# Altium PCB FC_F7_PCB.PcbDoc (part 1 of 2)
Units mm, origin at the board's own origin, x right, y up, seen from the top; angles counter-clockwise.
Board outline 36 x 36 mm, 4 copper layers (Top Layer, Ground Plane, Power Plane, Bottom Layer), stack 1.586 mm thick; 88 components, 73 nets, 327 pads, 57 vias.
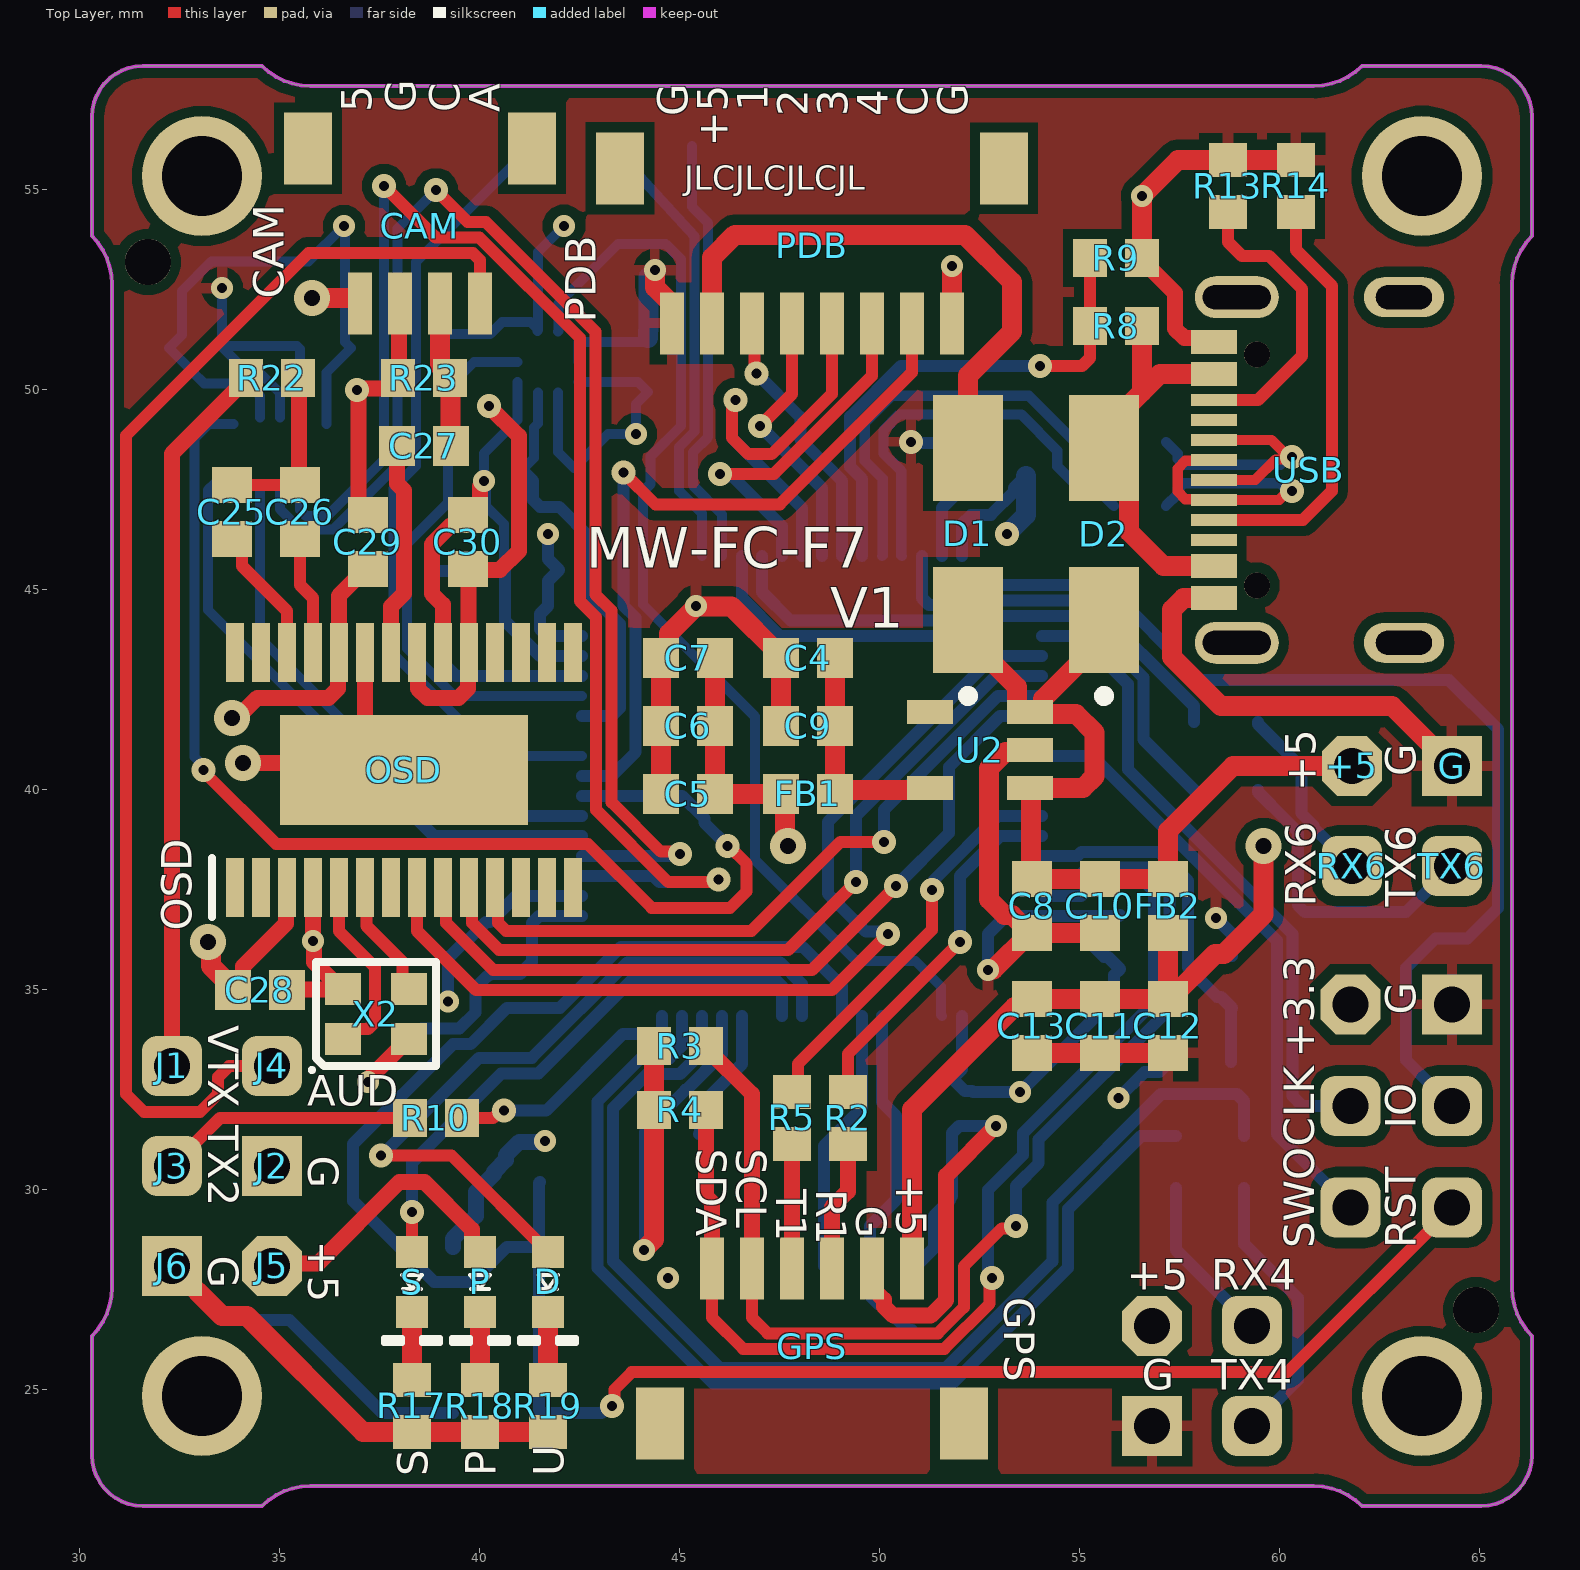
[diagram p0: Top Layer view]
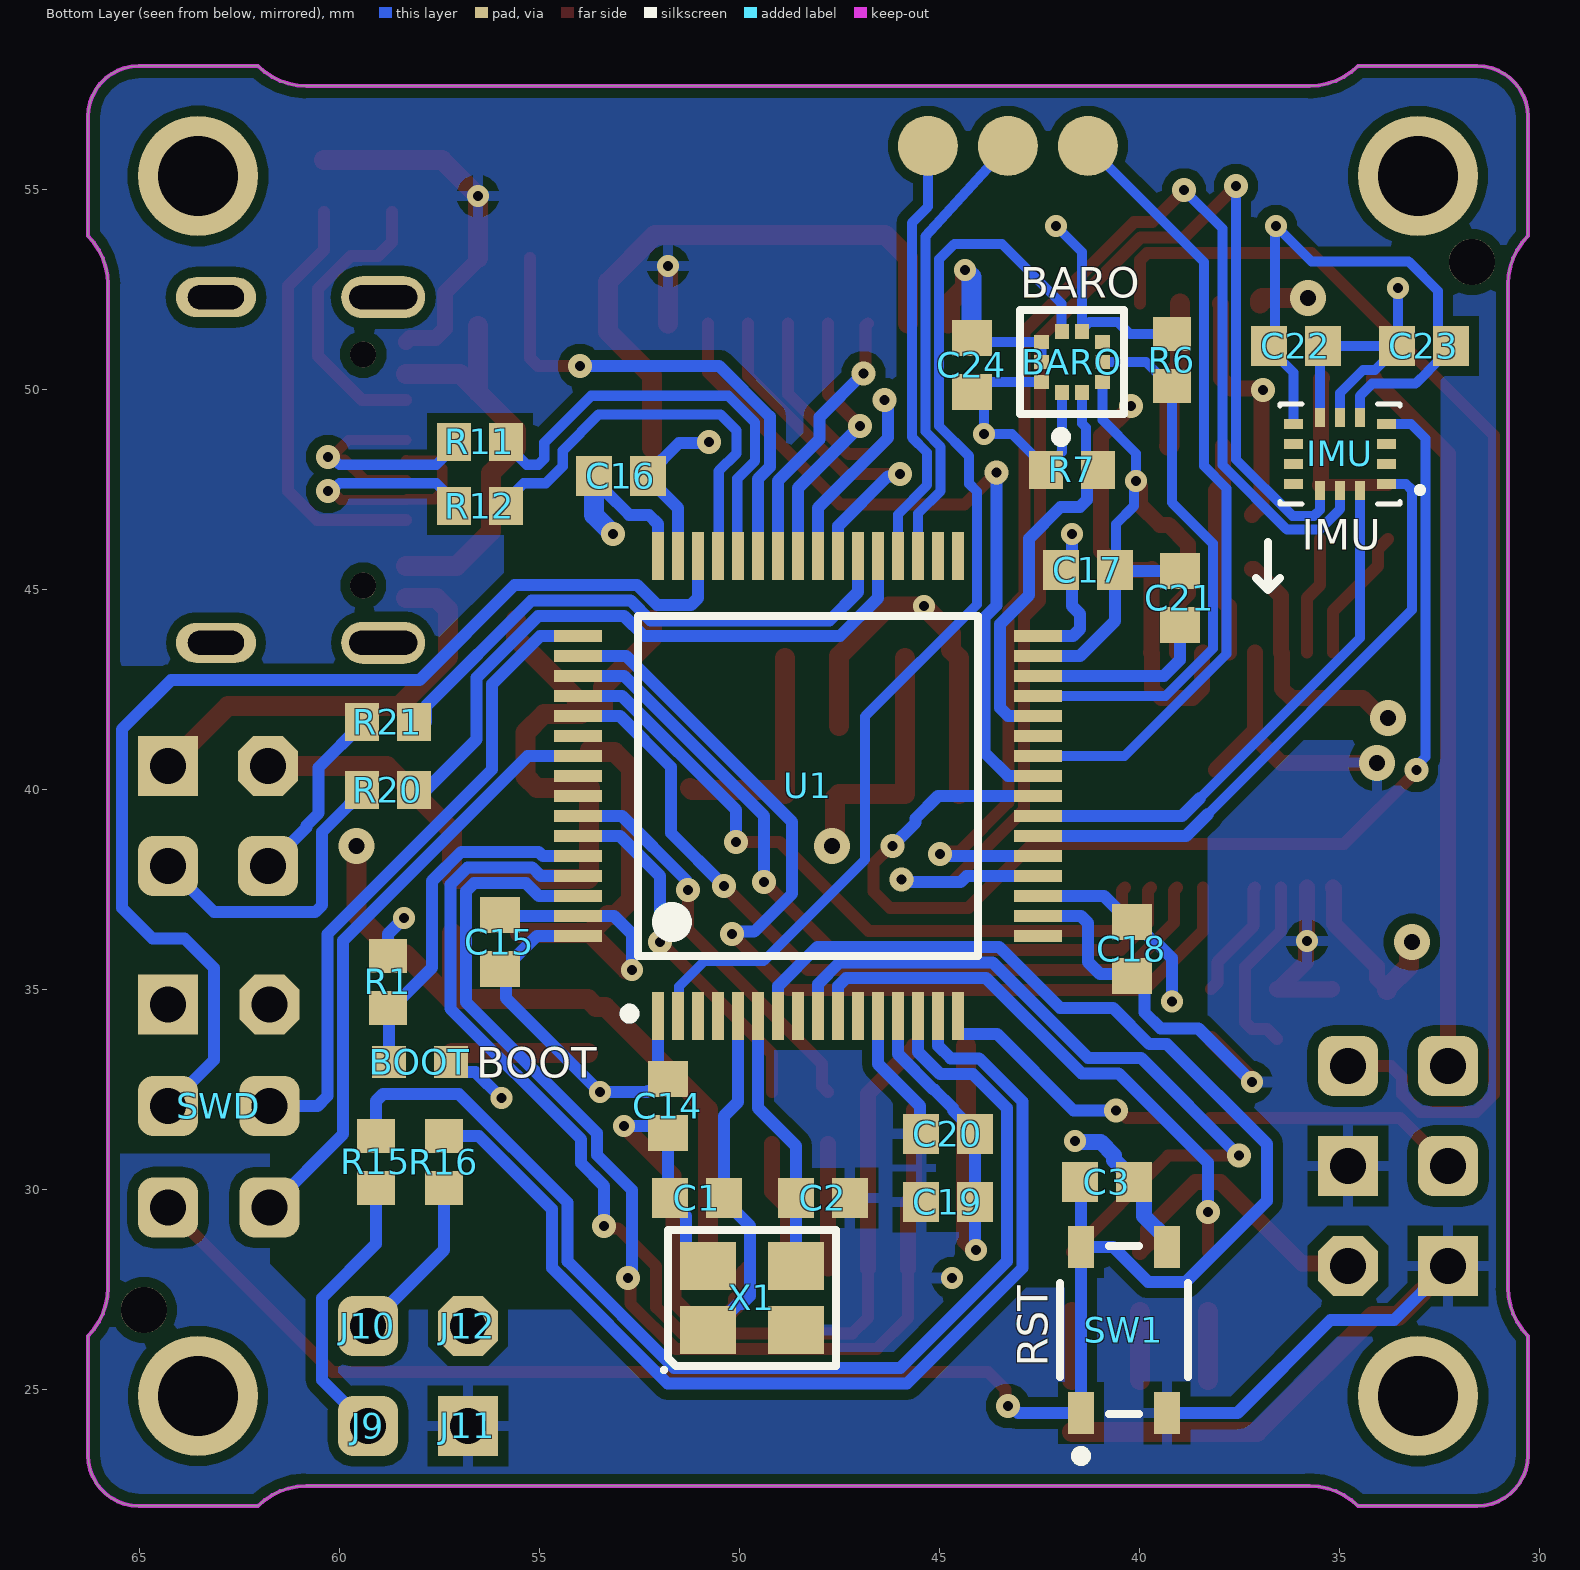
[diagram p1: Bottom Layer view, seen from below]
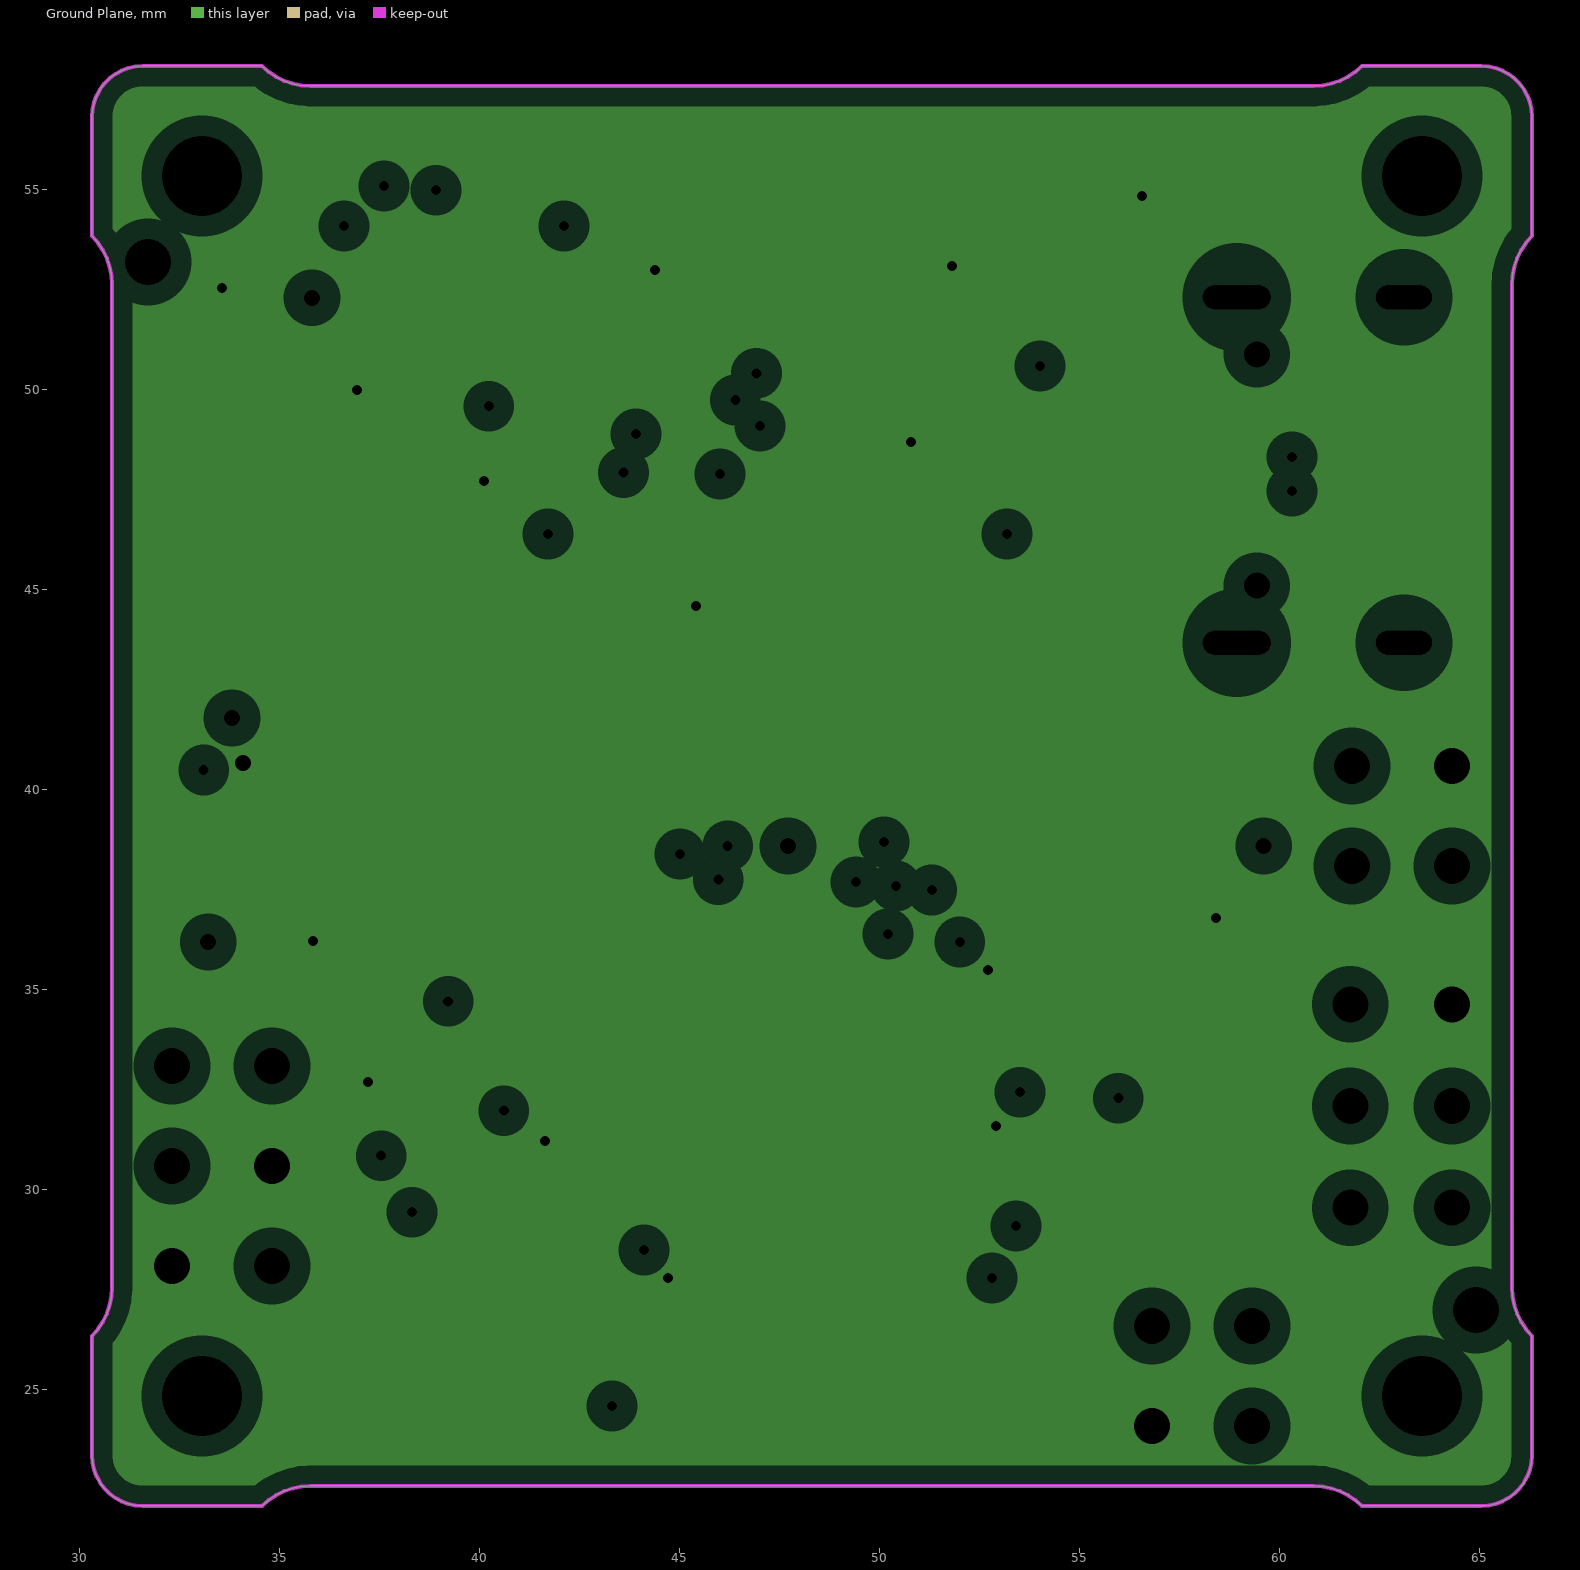
[diagram p2: Ground Plane, clearances drawn from the general rule]
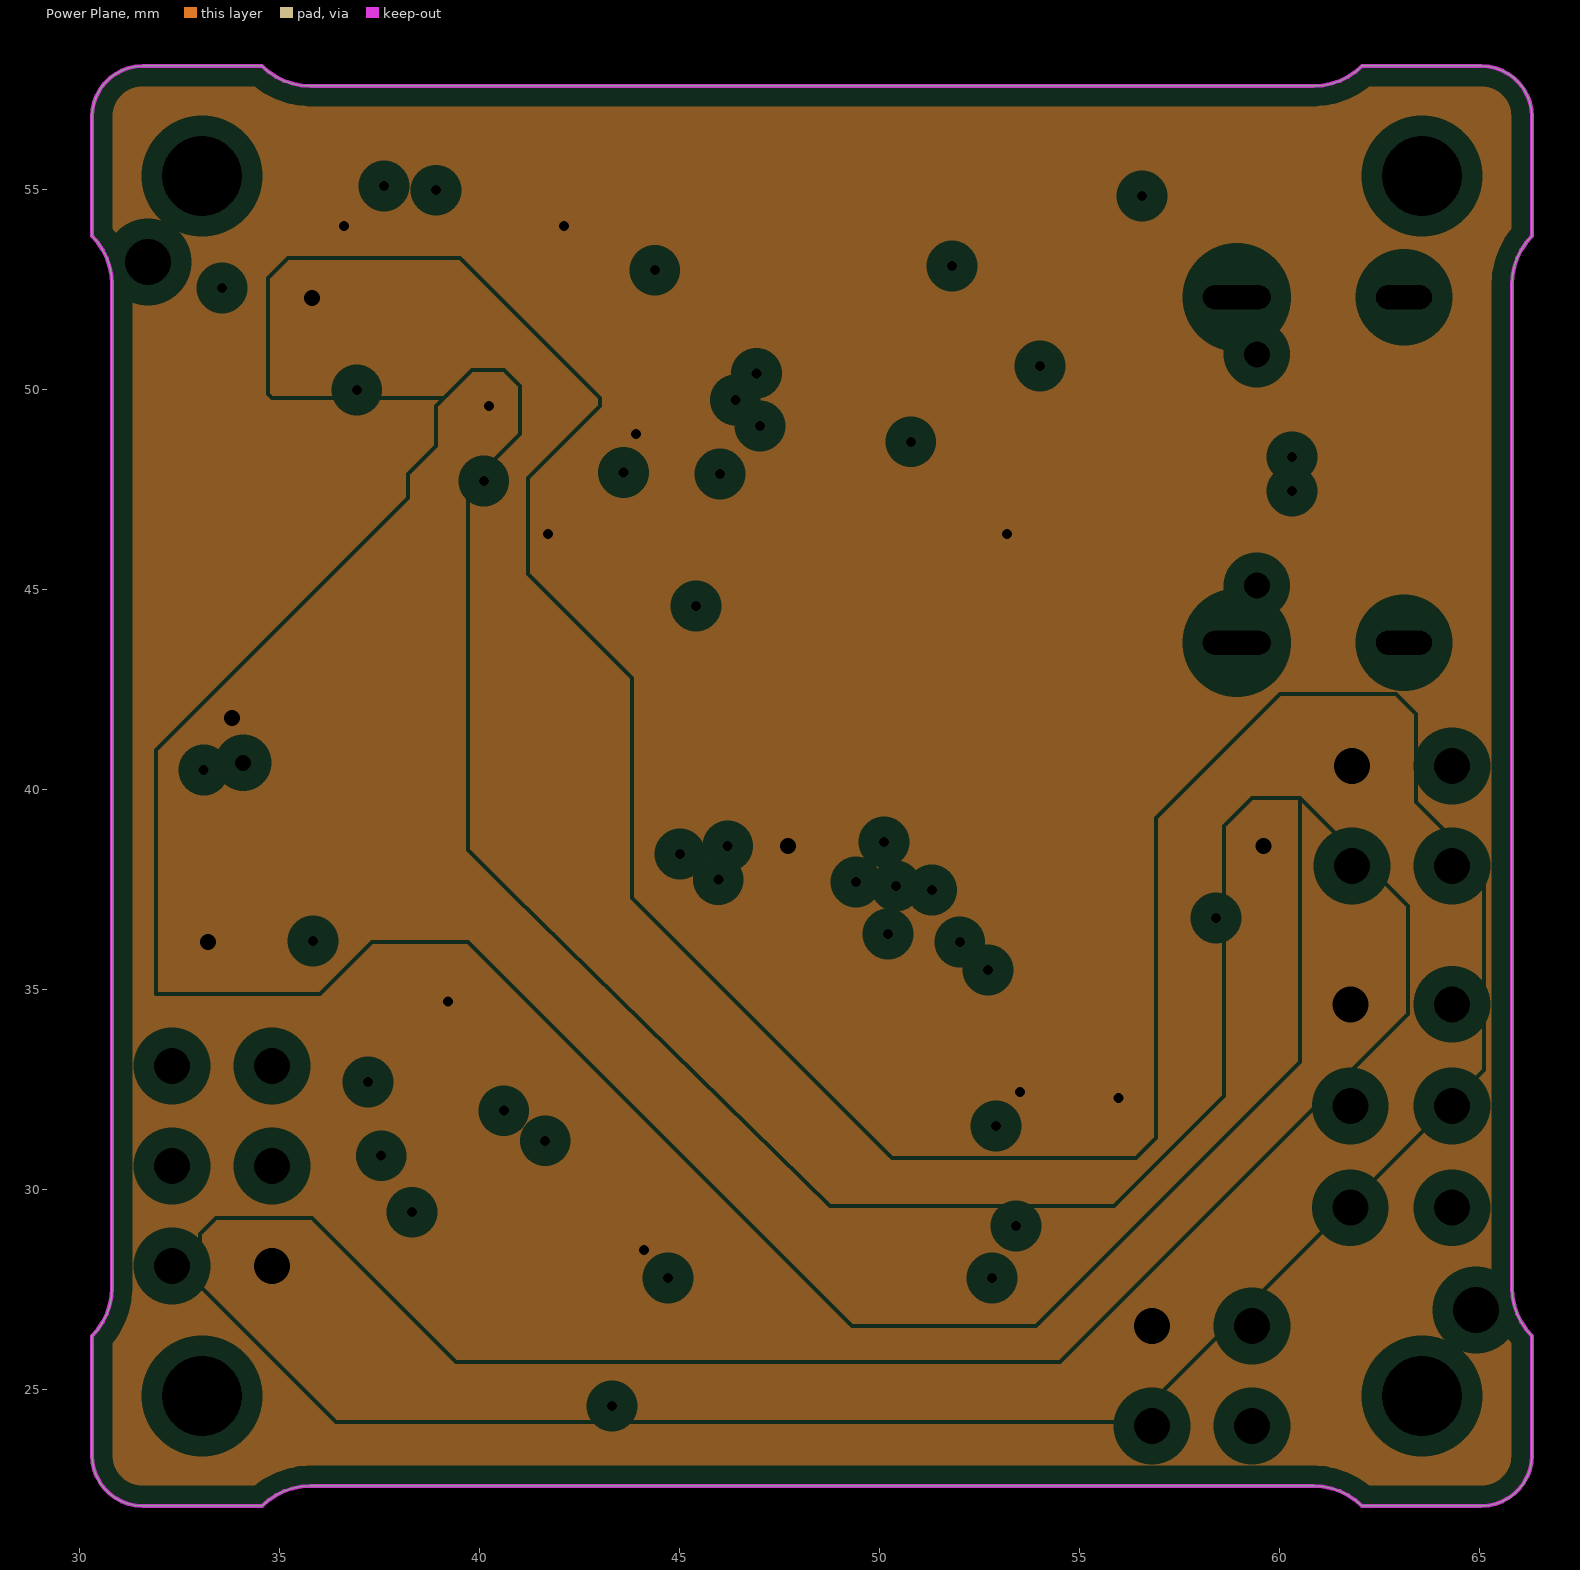
[diagram p3: Power Plane, clearances drawn from the general rule]
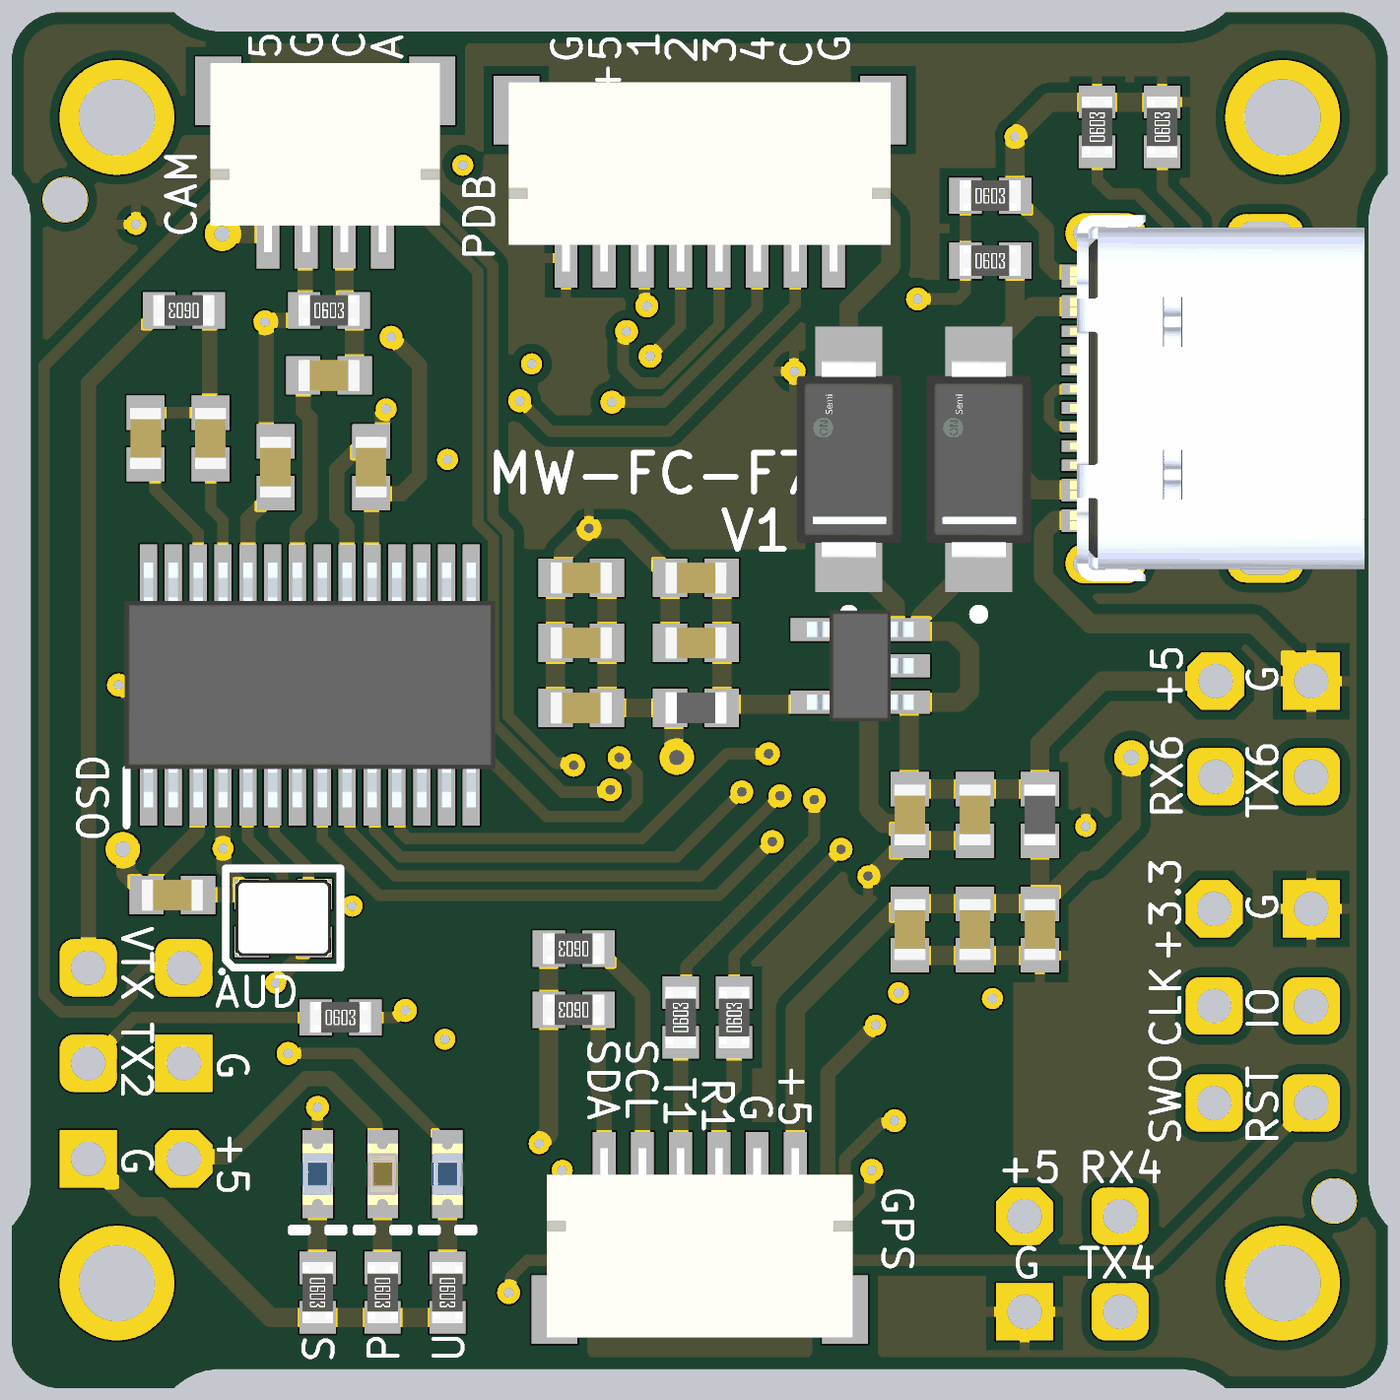
[diagram p5: 3D render of the assembled board from above, using the file's embedded part models]
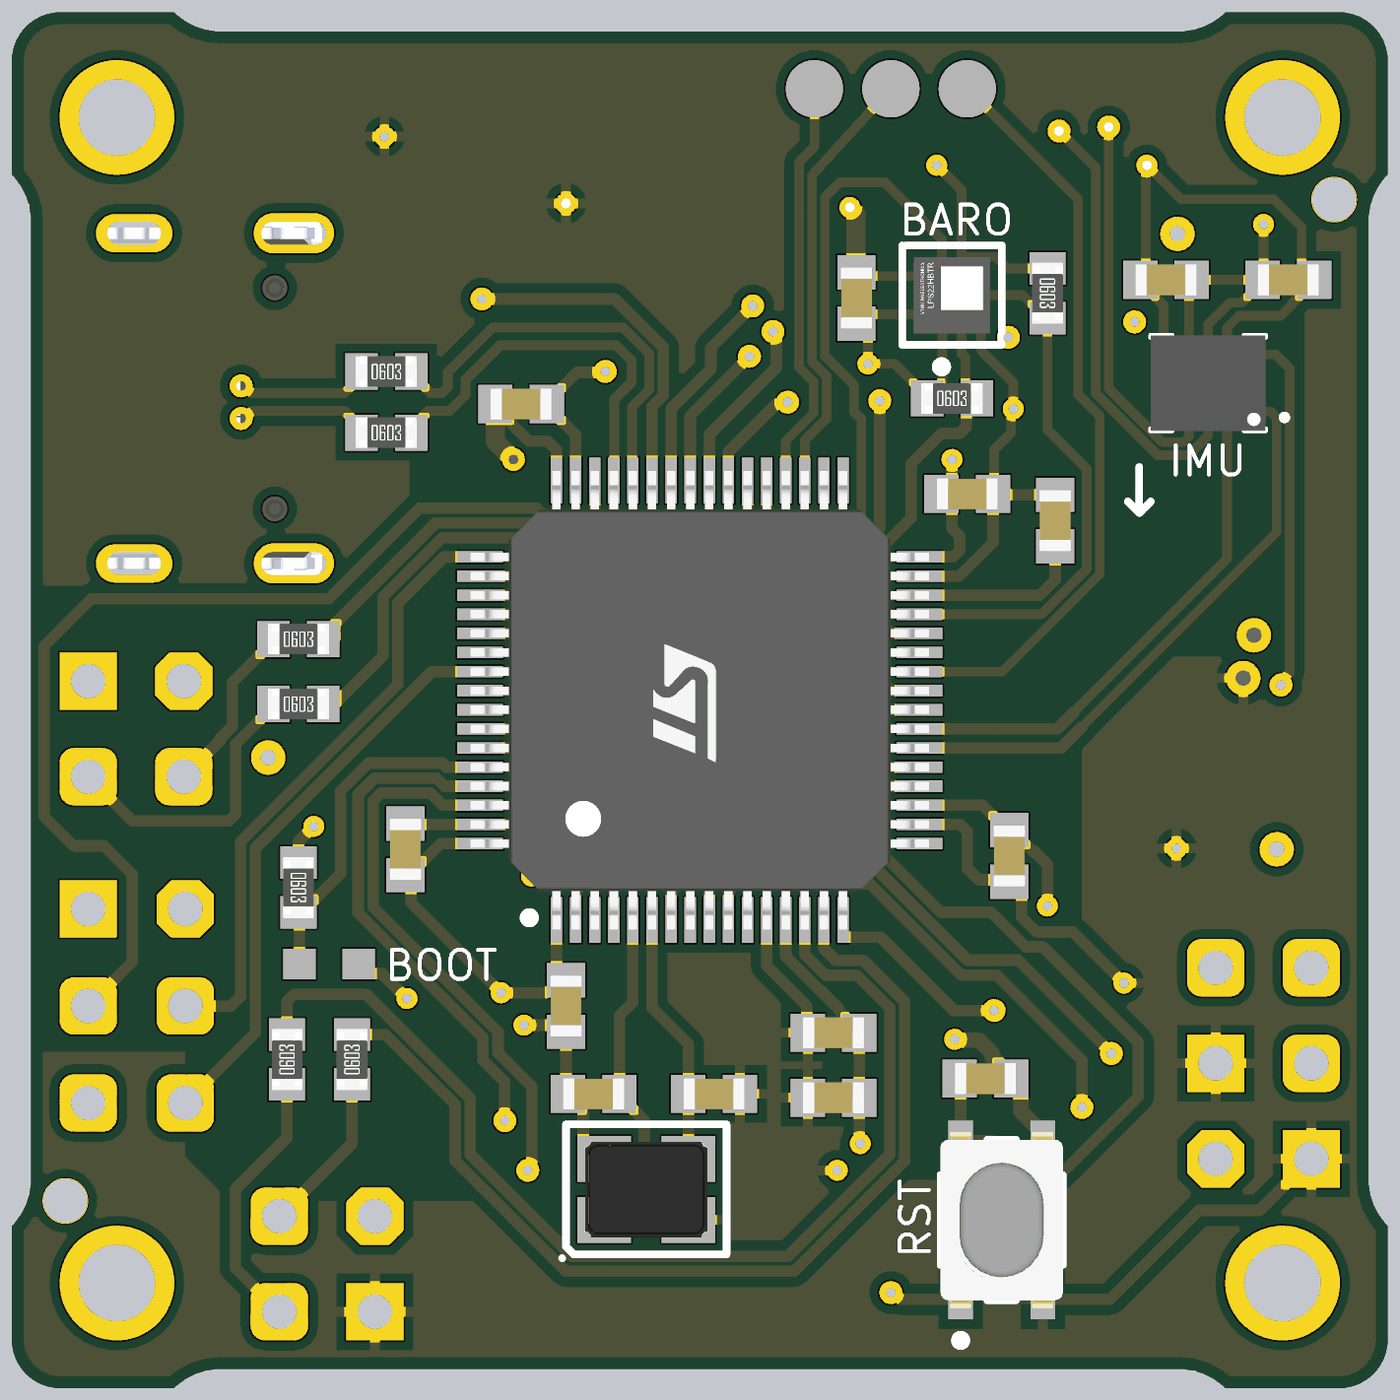
[diagram p6: 3D render of the assembled board from below, using the file's embedded part models]

## Layer stack, top to bottom
Top Solder: solder mask 0.0254, SM-001, Dk 4
Top Layer: signal copper 0.035
Dielectric 1: prepreg 0.2104, PP-017, Dk 4.6
Ground Plane: plane copper 0.0152, net GND
Dielectric 3: core 1.065, Core-039, Dk 4.6
Power Plane: plane copper 0.0152, net (Multiple Nets)
Dielectric 5: prepreg 0.2104, PP-017, Dk 4.6
Bottom Layer: signal copper 0.035
Bottom Solder: solder mask 0.0254, SM-001, Dk 4

## Board outline
30.3,23.37 30.3,26.35 ccw(c29.093,27.557) 30.8,27.557 30.8,52.643 ccw(c29.093,52.643) 30.3,53.85 30.3,56.83 cw(c31.57,56.83) 31.57,58.1 34.55,58.1 ccw(c35.757,59.307) 35.757,57.6 60.843,57.6 ccw(c60.843,59.307) 62.05,58.1 65.03,58.1 cw(c65.03,56.83) 66.3,56.83 66.3,53.85 ccw(c67.507,52.643) 65.8,52.643 65.8,27.557 ccw(c67.507,27.557) 66.3,26.35 66.3,23.37 cw(c65.03,23.37) 65.03,22.1 62.05,22.1 ccw(c60.843,20.893) 60.843,22.6 35.757,22.6 ccw(c35.757,20.893) 34.55,22.1 31.57,22.1 cw(c31.57,23.37)

## Design rules (kind name [scope] priority, off if disabled: settings)
Clearance [All] p1: gap=0.254 ignorepadtopadclearanceinfootprint=FALSE except(0: Arc-Hole Track-Hole SMDPad-Hole THPad-Hole Via-Hole Fill-Hole Poly-Hole Region-Hole Text-Hole; 0.09: Arc-Arc Arc-Track Track-Track; 0.127: SMDPad-SMDPad; 0.2: Arc-SMDPad Track-SMDPad; 0.5: SMDPad-THPad)
DiffPairsRouting [All] p1: maxlimit=0.203 minlimit=0.203 mostfreqgap=0.203 toplayer_minwidth=0.271 toplayer_maxwidth=0.271 toplayer_prefwidth=0.271 bottomlayer_minwidth=0.271 bottomlayer_maxwidth=0.271 bottomlayer_prefwidth=0.271 impedanceprofiledriven=TRUE impedanceprofileid={7BFADA2D-7B13-4B1E-B96C-2C4142A0F118} impedanceprofilevalue=90.000000 maxuncoupledlength=12.7
HoleSize [All] p1: absolutevalues=TRUE maxlimit=6.3 minlimit=0.2 maxpercent=80.000 minpercent=20.000
HoleToHoleClearance [All] p1: gap=0.5 allowstackedmicrovias=TRUE
MinimumAnnularRing [All] p1: minimumring=0.13
MinimumSolderMaskSliver [All] p1: minsoldermaskwidth=0.2
PlaneClearance [All] p1: clearance=0.508
PlaneConnect [All] p1: planeconnectstyle=Relief reliefexpansion=0.508 reliefentries=4 reliefconductorwidth=0.254 reliefairgap=0.254
PolygonConnect [All] p1: connectstyle=Relief reliefconductorwidth=0.254 reliefentries=4 polygonreliefangle="90 Angle" airgapwidth=0.254
RoutingVias [All] p1: holewidth=0.3 width=0.7 viastyle="Through Hole" minholewidth=0.25 minwidth=0.55 maxholewidth=0.4 maxwidth=0.9
SilkToSilkClearance [All] p1: silktosilkclearance=0.15
SilkToSolderMaskClearance [IsPad] p1: minsilkscreentomaskgap=0.15 clearancetoexposedcopper=FALSE
SolderMaskExpansion [All] p1: expansion=0.05 istentingtop=FALSE
UnRoutedNet [All] p1: checkbadconnections=TRUE
Width [All] p1: maxlimit=0.5 minlimit=0.2 preferedwidth=0.3
21 further rules are at their usual default settings.

## Classes and differential pairs
component class Sensors: BARO C22 C23 C24 GPS IMU R2 R3 R4 R5 R7 TX6
component class "Power Distribution": C4 C5 C6 C7 C8 C9 C10 C11 C12 C13 C14 C15 C16 C17 C18 C19 C20 C21 D1 D2 FB1 FB2 U2
component class Peripherials: +5 CAM D G J1 J2 J3 J4 J5 J6 J9 J10 J11 J12 P PDB R8 R9 R10 R11 R12 R13 R14 R15 R16 R17 R18 R19 R20 R21 RX6 S SWD TX6 USB
component class On-Screen-Display: C25 C26 C27 C28 C29 C30 OSD R22 R23 X2
component class MCU: BOOT BOOT1 C1 C2 C3 R1 SW1 U1 X1
differential pair USB_FS_D: +USB_FS_D_P -USB_FS_D_N
differential pair USB_D: +USB_D_P -USB_D_N

## Components (designator, comment, footprint, x,y, rotation, side; value= is the part's Value field where it differs from the comment)
+5 "Socket" PIN1#1 61.8,40.6 r0 top (schematic designator J8)
BARO "LPS22HBTR" FP-HLGA-10L-8479831-0 41.7,50.7 r90 bottom
BOOT "DNM" C0603_DNM 58,33.2 r0 bottom
C1 "8 pF" "CAP 0603_1608" 51.075,29.8 r0 bottom
C2 "8 pF" "CAP 0603_1608" 47.925,29.8 r0 bottom
C3 "0.1µF" "CAP 0603_1608" 40.825,30.2 r180 bottom
C4 "1 µF" "CAP 0603_1608" 48.2,43.3 r0 top
C5 "10nF" "CAP 0603_1608" 45.2,39.9 r0 top
C6 "100 pF" "CAP 0603_1608" 45.2,41.6 r0 top
C7 "47 µF" "CAP 0603_1608" 45.2,43.3 r0 top
C8 "1 µF" "CAP 0603_1608" 53.8,37.1 r90 top
C9 "1 µF" "CAP 0603_1608" 48.2,41.6 r0 top
C10 "1 µF" "CAP 0603_1608" 55.5,37.1 r90 top
C11 "10nF" "CAP 0603_1608" 55.5,34.1 r90 top
C12 "100 pF" "CAP 0603_1608" 57.2,34.1 r90 top
C13 "47 µF" "CAP 0603_1608" 53.8,34.1 r90 top
C14 "4.7 µF" "CAP 0603_1608" 51.8,32.1 r90 bottom
C15 "0.1µF" "CAP 0603_1608" 56,36.2 r270 bottom
C16 "0.1µF" "CAP 0603_1608" 52.975,47.85 r0 bottom
C17 "0.1µF" "CAP 0603_1608" 41.3,45.5 r0 bottom
C18 "0.1µF" "CAP 0603_1608" 40.2,36.025 r90 bottom
C19 "1 µF" "CAP 0603_1608" 44.8,29.7 r180 bottom
C20 "0.1µF" "CAP 0603_1608" 44.8,31.4 r180 bottom
C21 "4.7µF" "CAP 0603_1608" 39,44.8 r270 bottom
C22 "0.1µF" "CAP 0603_1608" 36.1,51.1 r180 bottom
C23 "0.1µF" "CAP 0603_1608" 32.9,51.1 r0 bottom
C24 "0.1µF" "CAP 0603_1608" 44.2,50.625 r90 bottom
C25 "47 µF" "CAP 0603_1608" 33.8,46.95 r90 top
C26 "22 µF" "CAP 0603_1608" 35.5,46.95 r90 top
C27 "0.1µF" "CAP 0603_1608" 38.6,48.6 r180 top
C28 "0.1µF" "CAP 0603_1608" 34.5,35 r180 top
C29 "0.1µF" "CAP 0603_1608" 37.2,46.2 r270 top
C30 "0.1µF" "CAP 0603_1608" 39.7,46.2 r270 top
CAM "SM04B-SRSS-TB(LF)(SN)" "JST SM04B-SRSS-TB" 38.5,54.2 r0 top
D "Blue" "LED 0603_1608 BLUE" 41.7,27.7 r270 top (schematic designator DATA)
D1 "SS14" FP-403AE-MFG 52.2,46.4 r270 top
D2 "SS14" FP-403AE-MFG 55.6,46.4 r270 top
FB1 "120RF" "FER 0603_1608" 48.2,39.9 r180 top value="120 Ohms @ 100 MHz"
FB2 "120RF" "FER 0603_1608" 57.2,37.1 r270 top value="120 Ohms @ 100 MHz"
G "Socket" PIN1#2 64.3,40.6 r180 top (schematic designator J7)
GPS "SM06B-SRSS-TB(LF)(SN)" "JST SM06B-SRSS-TB" 48.3,26 r180 top
IMU "BMI270" XDCR_BMI270 35,48.4 r0 bottom
J1 "Socket" PIN1#3 32.3,33.1 r0 top
J2 "Socket" PIN1#2 34.8,30.6 r0 top
J3 "Socket" PIN1#3 32.3,30.6 r0 top
J4 "Socket" PIN1#3 34.8,33.1 r0 top
J5 "Socket" PIN1#1 34.8,28.1 r0 top
J6 "Socket" PIN1#2 32.3,28.1 r0 top
J9 "Socket" PIN1#3 59.3,24.1 r180 bottom
J10 "Socket" PIN1#3 59.3,26.6 r180 bottom
J11 "Socket" PIN1#2 56.8,24.1 r180 bottom
J12 "Socket" PIN1#1 56.8,26.6 r180 bottom
OSD "AT7456E" SOP65P640X120-29N 38.1,40.5 r90 top
P "Red" "LED 0603_1608 RED" 40,27.7 r270 top (schematic designator PWR)
PDB "SM08B-SRSS-TB(LF)(SN)" "JST SM08B-SRSS-TB" 48.3,53.7 r0 top
R1 "10 kOhms" "RES 0603_1608" 58.8,35.2 r270 bottom
R2 "1 kOhms" "RES 0603_1608" 49.2,31.8 r90 top
R3 "10 kOhms" "RES 0603_1608" 45,33.6 r180 top
R4 "10 kOhms" "RES 0603_1608" 45,32 r180 top
R5 "1 kOhms" "RES 0603_1608" 47.8,31.8 r90 top
R6 "10 kOhms" "RES 0603_1608" 39.2,50.75 r270 bottom
R7 "10 kOhms" "RES 0603_1608" 41.7,48 r180 bottom
R8 "10 kOhms" "RES 0603_1608" 55.9,51.6 r0 top
R9 "10 kOhms" "RES 0603_1608" 55.9,53.3 r0 top
R10 "1 kOhms" "RES 0603_1608" 38.9,31.8 r0 top
R11 "22 Ohms" "RES 0603_1608" 56.5,48.7 r180 bottom
R12 "22 Ohms" "RES 0603_1608" 56.5,47.1 r180 bottom
R13 "5.1 kOhms" "RES 0603_1608" 58.7,55.1 r90 top
R14 "5.1 kOhms" "RES 0603_1608" 60.4,55.1 r90 top
R15 "1 kOhms" "RES 0603_1608" 59.1,30.7 r90 bottom
R16 "1 kOhms" "RES 0603_1608" 57.4,30.7 r90 bottom
R17 "510 Ohms" "RES 0603_1608" 38.3,24.6 r270 top
R18 "510 Ohms" "RES 0603_1608" 40,24.6 r270 top
R19 "510 Ohms" "RES 0603_1608" 41.7,24.6 r270 top
R20 "1 kOhms" "RES 0603_1608" 58.8,40 r180 bottom
R21 "1 kOhms" "RES 0603_1608" 58.8,41.7 r180 bottom
R22 "75 Ohms" "RES 0603_1608" 34.8,50.3 r180 top
R23 "75 Ohms" "RES 0603_1608" 38.6,50.3 r0 top
RX6 "Socket" PIN1#3 61.8,38.1 r0 top (schematic designator J14)
S "Blue" "LED 0603_1608 BLUE" 38.3,27.7 r270 top (schematic designator STATUS)
SW1 "PTS810SJM250" FP-PTS810SJM250SMTRLFS-MFG 40.4,26.5 r90 bottom
SWD "Header 3X2" HDR2X3 61.76,29.56 r90 bottom
TX6 "Socket" PIN1#3 64.3,38.1 r0 top (schematic designator J13)
U1 "STM32F722RET6" FP-LQFP64-5W-IPC_A 48.3,40.1 r90 bottom
U2 "NCP161ASN330T1G" SOT95P280X145-5N 52.5,41 r180 top
USB "USB4105-GF-A" GCT_USB4105-GF-A 63.1,48 r90 top
X1 "16 MHz" "NDK NX3225GA" 49.7,27.3 r180 bottom
X2 "27MHz" "ABRACON ABM10" 37.4,34.4 r0 top

## Footprints (in the part's own frame and the unit in brackets; to place one, negate y for a bottom-side part, rotate by r counter-clockwise, add the part's x,y. Pads: shape width x height; smd on the part's side, far side on the other; paste and mask are expansions set on the pad)
"ABRACON ABM10" [mm] "Crystal, 4-Leads, Body 2.00x2.45mm, Pitch 1.65mm, IPC Medium Density"
  rect 0.9x0.8 smd: 1(-0.825,-0.625) 2(0.825,-0.625) 3(0.825,0.625) 4(-0.825,0.625)
  silkscreen extent -1.65,-1.45 1.5,1.3, body extent -1.27,-1.02 1.28,1.03, height 0.5
C0603_DNM [mm] "Chip Capacitor, 2-Leads, Body 1.60x0.80mm, IPC High Density"
  rect 0.85x0.8 smd: 1(-0.775,0) 2(0.775,0)
"CAP 0603_1608" [mm] "Chip Capacitor, 2-Leads, Body 1.60x0.80mm, IPC Medium Density"
  rect 0.9x1 smd: 1(-0.675,0) 2(0.675,0)
  body extent -0.8,-0.41 0.8,0.41, height 0.82
"FER 0603_1608" [mm] "Chip Ferrite, 2-Leads, Body 1.60x0.80mm, IPC Medium Density"
  rect 0.9x1 smd: 1(-0.675,0) 2(0.675,0)
  body extent -0.8,-0.41 0.8,0.41, height 0.82
FP-403AE-MFG [mm]
  rect 2.65x1.75 smd paste+0 mask+0: 1(-2.15,0) 2(2.15,0)
  silkscreen extent 3.93,-0.12 4.17,0.13, body extent -3.57,-1.58 3.57,1.58, height 0.25
FP-HLGA-10L-8479831-0 [mm]
  rect 0.375x0.35 smd paste+0 mask+0: 1(-0.763,0.25) 2(-0.763,-0.25) 6(0.763,-0.25) 7(0.763,0.25)
  rect 0.35x0.375 smd paste+0 mask+0: 3(-0.5,-0.763) 4(0,-0.763) 5(0.5,-0.763) 8(0.5,0.763) 9(0,0.763) 10(-0.5,0.763)
  silkscreen extent -2,-1.3 1.3,1.3, body extent -1,-1 1,1, height 0.8
FP-LQFP64-5W-IPC_A [mm]
  rect 1.2x0.3 smd paste+0: 1(-5.75,3.75) 2(-5.75,3.25) 3(-5.75,2.75) 4(-5.75,2.25) 5(-5.75,1.75) 6(-5.75,1.25) 7(-5.75,0.75) 8(-5.75,0.25) 9(-5.75,-0.25) 10(-5.75,-0.75) 11(-5.75,-1.25) 12(-5.75,-1.75) 13(-5.75,-2.25) 14(-5.75,-2.75) 15(-5.75,-3.25) 16(-5.75,-3.75) 33(5.75,-3.75) 34(5.75,-3.25) 35(5.75,-2.75) 36(5.75,-2.25) 37(5.75,-1.75) 38(5.75,-1.25) 39(5.75,-0.75) 40(5.75,-0.25) 41(5.75,0.25) 42(5.75,0.75) 43(5.75,1.25) 44(5.75,1.75) 45(5.75,2.25) 46(5.75,2.75) 47(5.75,3.25) 48(5.75,3.75)
  rect 0.3x1.2 smd paste+0: 17(-3.75,-5.75) 18(-3.25,-5.75) 19(-2.75,-5.75) 20(-2.25,-5.75) 21(-1.75,-5.75) 22(-1.25,-5.75) 23(-0.75,-5.75) 24(-0.25,-5.75) 25(0.25,-5.75) 26(0.75,-5.75) 27(1.25,-5.75) 28(1.75,-5.75) 29(2.25,-5.75) 30(2.75,-5.75) 31(3.25,-5.75) 32(3.75,-5.75) 49(3.75,5.75) 50(3.25,5.75) 51(2.75,5.75) 52(2.25,5.75) 53(1.75,5.75) 54(1.25,5.75) 55(0.75,5.75) 56(0.25,5.75) 57(-0.25,5.75) 58(-0.75,5.75) 59(-1.25,5.75) 60(-1.75,5.75) 61(-2.25,5.75) 62(-2.75,5.75) 63(-3.25,5.75) 64(-3.75,5.75)
  silkscreen extent -5.82,-4.25 4.25,4.59, body extent -6,-6 6,6, height 1.6
FP-PTS810SJM250SMTRLFS-MFG [mm]
  rect 1.05x0.65 smd paste+0 mask+0: 1(-2.075,1.075) 2(2.075,1.075) 3(-2.075,-1.075) 4(2.075,-1.075)
  silkscreen extent -3.27,-1.6 2.1,1.6, body extent -2.3,-1.6 2.3,1.6, height 2.7
GCT_USB4105-GF-A [mm]
  rect 0.6x1.15 smd: A1_B12(-3.2,4.755) A4_B9(-2.4,4.755) B1_A12(3.2,4.755) B4_A9(2.4,4.755)
  rect 0.3x1.15 smd: A5(-1.25,4.755) A6(-0.25,4.755) A7(0.25,4.755) A8(1.25,4.755) B5(1.75,4.755) B6(0.75,4.755) B7(-0.75,4.755) B8(-1.75,4.755)
  oval 1.05x2.1 hole 0.6 slot 1.7 at 90 deg: S1(-4.32,4.18) S4(4.32,4.18)
  oval 1x2 hole 0.6 slot 1.4 at 90 deg: S2(-4.32,0) S3(4.32,0)
  round 0.65 hole 0.65 unplated: ""(-2.89,3.68) ""(2.89,3.68)
  body extent -4.79,-2.6 4.79,5.11, height 3.31
HDR2X3 [mm] "Connector; Header; 3x2 Position"
  rrect50% 1.5x1.5 hole 0.9: 1(0,0) 2(0,2.54) 3(2.54,0) 4(2.54,2.54)
  oct 1.5x1.5 hole 0.9: 5(5.08,0)
  rect 1.5x1.5 hole 0.9: 6(5.08,2.54)
"JST SM04B-SRSS-TB" [mm] "1.0mm pitch/Disconnectable Crimp style connector"
  rect 0.6x1.55 smd: 1(-1.5,-2.032) 2(-0.5,-2.032) 3(0.5,-2.032) 4(1.5,-2.032)
  rect 1.2x1.8 smd: M(-2.8,1.843) M(2.8,1.843)
  body extent -3,-2.38 3,2.57, height 2.95
"JST SM06B-SRSS-TB" [mm] "1.0mm pitch/Disconnectable Crimp style connector"
  rect 0.6x1.55 smd: 1(-2.5,-2.032) 2(-1.5,-2.032) 3(-0.5,-2.032) 4(0.5,-2.032) 5(1.5,-2.032) 6(2.5,-2.032)
  rect 1.2x1.8 smd: M(-3.8,1.843) M(3.8,1.843)
  body extent -4,-2.38 4,2.57, height 2.95
"JST SM08B-SRSS-TB" [mm] "1.0mm pitch/Disconnectable Crimp style connector"
  rect 0.6x1.55 smd: 1(-3.5,-2.032) 2(-2.5,-2.032) 3(-1.5,-2.032) 4(-0.5,-2.032) 5(0.5,-2.032) 6(1.5,-2.032) 7(2.5,-2.032) 8(3.5,-2.032)
  rect 1.2x1.8 smd: M(-4.8,1.843) M(4.8,1.843)
  body extent -5,-2.38 5,2.57, height 2.95
"LED 0603_1608 BLUE" [mm] "Chip Diode, 2-Leads, Body 1.60x0.80mm, IPC Medium Density"
  rect 0.8x0.8 smd: 1(-0.75,0) 2(0.75,0)
  silkscreen extent -0.18,-0.7 1.52,0.7, body extent -0.8,-0.4 0.8,0.4, height 0.53
"LED 0603_1608 RED" [mm] "Chip Diode, 2-Leads, Body 1.60x0.80mm, IPC Medium Density"
  rect 0.8x0.8 smd: 1(-0.75,0) 2(0.75,0)
  silkscreen extent -0.18,-0.7 1.52,0.7, body extent -0.8,-0.4 0.8,0.4, height 0.53
"NDK NX3225GA" [mm] "Crystal, 4-Leads, Body 2.50x3.20mm, Pitch 2.20mm, IPC Medium Density"
  rect 1.4x1.2 smd: 1(-1.1,-0.8) 2(1.1,-0.8) 3(1.1,0.8) 4(-1.1,0.8)
  silkscreen extent -2.25,-1.85 2.1,1.7, body extent -1.61,-1.26 1.61,1.26, height 0.75
PIN1#1 [mm] "Connector; Plug"
  oct 1.5x1.5 hole 0.9: 1(0,0)
PIN1#2 [mm] "Connector; Plug"
  rect 1.5x1.5 hole 0.9: 1(0,0)
PIN1#3 [mm] "Connector; Plug"
  rrect50% 1.5x1.5 hole 0.9: 1(0,0)
"RES 0603_1608" [mm] "Chip Resistor, 2-Leads, Body 1.60x0.80mm, IPC Medium Density"
  rect 0.85x0.95 smd: 1(-0.65,0) 2(0.65,0)
  body extent -0.8,-0.4 0.8,0.4, height 0.45
SOP65P640X120-29N [mm]
  rect 1.475x0.45 smd: 1(-2.938,4.225) 2(-2.938,3.575) 3(-2.938,2.925) 4(-2.938,2.275) 5(-2.938,1.625) 6(-2.938,0.975) 7(-2.938,0.325) 8(-2.938,-0.325) 9(-2.938,-0.975) 10(-2.938,-1.625) 11(-2.938,-2.275) 12(-2.938,-2.925) 13(-2.938,-3.575) 14(-2.938,-4.225) 15(2.938,-4.225) 16(2.938,-3.575) 17(2.938,-2.925) 18(2.938,-2.275) 19(2.938,-1.625) 20(2.938,-0.975) 21(2.938,-0.325) 22(2.938,0.325) 23(2.938,0.975) 24(2.938,1.625) 25(2.938,2.275) 26(2.938,2.925) 27(2.938,3.575) 28(2.938,4.225)
  rect 2.75x6.2 smd: 29(0,0)
  silkscreen extent -3.67,4.8 -2.2,4.8, body extent -3.2,-4.85 3.2,4.85, height 1.2
SOT95P280X145-5N [mm]
  rect 1.15x0.6 smd: 1(-1.25,0.95) 2(-1.25,0) 3(-1.25,-0.95) 4(1.25,-0.95) 5(1.25,0.95)
  body extent -1.4,-1.45 1.4,1.45, height 1.45
XDCR_BMI270 [mm]
  rect 0.475x0.25 smd: 1(-1.162,0.75) 2(-1.162,0.25) 3(-1.162,-0.25) 4(-1.162,-0.75) 8(1.162,-0.75) 9(1.162,-0.25) 10(1.162,0.25) 11(1.162,0.75)
  rect 0.25x0.475 smd: 5(-0.5,-0.913) 6(0,-0.913) 7(0.5,-0.913) 12(0.5,0.913) 13(0,0.913) 14(-0.5,0.913)
  silkscreen extent -2.07,-1.25 1.5,1.25, body extent -1.5,-1.25 1.5,1.25, height 0.87

## Part data
BARO: library part CMP-12182-000004-1, "MEMS NANO PRESSURE SENSOR: 260-1", manufacturer=STMicroelectronics, Max Supply Voltage=3.6V, Min Supply Voltage=1.7V, Operating Supply Current=3-12uA, Package=HLGA-10L-8479831, Temperature="-40°C to +85°C", Temperature Range High=+85°C, Temperature Range Low=-40°C, Automotive=No, Category=IC, componentlink2description=Datasheet, componentlink2url=https://www.st.com/resource/en/datasheet/lps22hb.pdf, Device Class L1=Sensors, Device Class L2="Pressure Sensors", Device Class L3=unset, Digikey Description="MEMS NANO PRESSURE SENSOR: 260-1", Footprint Url=https://www.st.com/content/ccc/resource/technical/document/technical_note/73/17/9c/16/dd/96/4a/01/CD00134799.pdf/files/CD00134799.pdf/jcr:content/translations/en.CD00134799.pdf, Height=0.8mm, Lead Free=Yes, Manufacturer Part Number=LPS22HBTR, Octopart=https://octopart.com/lps22hbtr-stmicroelectronics-51851131, Port Style="No Port", RoHS=TRUE, Sensor Output=I2C,SPI
BOOT: library part CAP_0603_DNM, "CAP 0603 DO NOT MOUNT"
C1 C2: library part CGA3E2C0G1H080D080AA, "CAP CER 8PF 50V C0G 0603", Device Package="0603 (1608 Metric)", manufacturer="TDK Corporation", Operating Temperature="-55°C ~ 125°C", Ratings=AEC-Q200, Supplier Part Number 1=445-5626-1-ND, Temperature Coefficient="C0G, NP0", Tolerance=±0.5pF, Voltage - Rated=50V, Applications=Automotive, Capacitance="8 pF", componentlink1description=Datasheet, componentlink1url=https://product.tdk.com/info/en/catalog/datasheets/mlcc_automotive_general_en.pdf?ref_disty=digikey, componentlink2description="DigiKey Link", componentlink2url=https://www.digikey.com/en/products/detail/tdk-corporation/CGA3E2C0G1H080D080AA/2443104, lastupdated="19.09.2022 13:00:41", Lifecycle Status=Active, Minimum Order=1, Mounting Type="Surface Mount, MLCC", Package / Case="0603 (1608 Metric)", packaging=TapeAndReel, Part Number=CGA3E2C0G1H080D080AA, Part Status=Active, partid=15270, price=0.02, series=CGA, Size / Dimension="0.063\" L x 0.031\" W (1.60mm x 0.80mm)", Supplier 1=DigiKey, Thickness (Max)="0.035\" (0.90mm)"
C3 C15 C16 C17 C18 C20 C22 C23 C24 C27 C28 C29 C30: library part 06033C104JAT4A, "CAP CER 0.1UF 25V X7R 0603", Device Package="0603 (1608 Metric)", manufacturer="AVX Corporation", Operating Temperature="-55°C ~ 125°C", Supplier Part Number 1=478-11510-1-ND, Temperature Coefficient=X7R, Tolerance=±5%, Voltage - Rated=25V, Applications="General Purpose", Capacitance=0.1µF, componentlink1description=Datasheet, componentlink1url=http://datasheets.avx.com/X7RDielectric.pdf, componentlink2description="DigiKey Link", componentlink2url=http://digikey.com/product-detail/en/avx-corporation/06033C104JAT4A/478-11510-1-ND/8107711, lastupdated="02.09.2020 01:03:22", Lifecycle Status=Active, Minimum Order=1, Mounting Type="Surface Mount, MLCC", Package / Case="0603 (1608 Metric)", packaging=TapeAndReel, Part Number=06033C104JAT4A, Part Status=Active, partid=10083, price=0.06, series=-, Size / Dimension="0.063\" L x 0.032\" W (1.60mm x 0.81mm)", Supplier 1=DigiKey, Thickness (Max)="0.035\" (0.90mm)"
C4 C8 C9 C10 C19: library part CL10A105KA8NFNC, "CAP CER 1UF 25V X5R 0603", Device Package="0603 (1608 Metric)", manufacturer="Samsung Electro-Mechanics", Operating Temperature="-55°C ~ 85°C", Supplier Part Number 1=1276-1859-1-ND, Temperature Coefficient=X5R, Tolerance=±10%, Voltage - Rated=25V, Applications="General Purpose", Capacitance="1 µF", componentlink1description=Datasheet, componentlink1url=http://www.samsungsem.com/kr/support/product-search/mlcc/CL10A105KA8NFNC.jsp, componentlink2description="DigiKey Link", componentlink2url=https://www.digikey.com/en/products/detail/samsung-electro-mechanics/CL10A105KA8NFNC/3887517, lastupdated="19.09.2022 13:00:45", Lifecycle Status=Active, Minimum Order=1, Mounting Type="Surface Mount, MLCC", Package / Case="0603 (1608 Metric)", packaging=TapeAndReel, Part Number=CL10A105KA8NFNC, Part Status=Active, partid=14268, price=0.01, series=CL, Size / Dimension="0.063\" L x 0.031\" W (1.60mm x 0.80mm)", Supplier 1=DigiKey, Thickness (Max)="0.035\" (0.90mm)"
C5 C11: library part 06033C103KAT2A, "CAP CER 10000PF 25V X7R 0603", Capacitance=10000pF, Device Package="0603 (1608 Metric)", manufacturer="AVX Corporation", Operating Temperature="-55°C ~ 125°C", Supplier Part Number 1=478-7902-1-ND, Temperature Coefficient=X7R, Tolerance=±10%, Voltage - Rated=25V, Applications="General Purpose", componentlink1description=Datasheet, componentlink1url=http://datasheets.avx.com/X7RDielectric.pdf, componentlink2description="DigiKey Link", componentlink2url=http://digikey.com/product-detail/en/avx-corporation/06033C103KAT2A/478-7902-1-ND/3881525, lastupdated="02.09.2020 01:03:14", Lifecycle Status=Active, Minimum Order=1, Mounting Type="Surface Mount, MLCC", Package / Case="0603 (1608 Metric)", packaging=TapeAndReel, Part Number=06033C103KAT2A, Part Status=Active, partid=14146, price=0.04, series=-, Size / Dimension="0.063\" L x 0.032\" W (1.60mm x 0.81mm)", Supplier 1=DigiKey, Thickness (Max)="0.035\" (0.90mm)"
C6 C12: library part C0603C101K8RAC7867, "CAP CER 100PF 10V X7R 0603", Device Package="0603 (1608 Metric)", manufacturer=KEMET, Operating Temperature="-55°C ~ 125°C", Supplier Part Number 1=399-14938-1-ND, Temperature Coefficient=X7R, Tolerance=±10%, Voltage - Rated=10V, Applications="Bypass, Decoupling", Capacitance="100 pF", componentlink1description=Datasheet, componentlink1url=https://api.kemet.com/component-edge/download/datasheet/C0603C101K8RAC7867.pdf, componentlink2description="DigiKey Link", componentlink2url=https://www.digikey.com/en/products/detail/kemet/C0603C101K8RAC7867/7382054, lastupdated="15.07.2022 11:28:44", Lifecycle Status=Active, Minimum Order=1, Mounting Type="Surface Mount, MLCC", Package / Case="0603 (1608 Metric)", packaging=TapeAndReel, Part Number=C0603C101K8RAC7867, Part Status=Active, partid=17919, price=0.04, series="SMD Comm X7R", Size / Dimension="0.063\" L x 0.031\" W (1.60mm x 0.80mm)", Supplier 1=DigiKey, Thickness (Max)="0.034\" (0.87mm)"
C7 C13 C25: library part GRM188R60J476ME15D, "CAP CER 47UF 6.3V X5R 0603", Device Package="0603 (1608 Metric)", manufacturer="Murata Electronics", Operating Temperature="-55°C ~ 85°C", Supplier Part Number 1=490-13247-1-ND, Temperature Coefficient=X5R, Tolerance=±20%, Voltage - Rated=6.3V, Applications="General Purpose", Capacitance="47 µF", componentlink1description=Datasheet, componentlink1url=https://www.murata.com/~/media/webrenewal/support/library/catalog/products/capacitor/mlcc/c02e.ashx?la=en-us, componentlink2description="DigiKey Link", componentlink2url=https://www.digikey.com/en/products/detail/murata-electronics/GRM188R60J476ME15D/5877410, Lifecycle Status=Active, Minimum Order=1, Mounting Type="Surface Mount, MLCC", Package / Case="0603 (1608 Metric)", packaging=TapeAndReel, Part Number=GRM188R60J476ME15D, Part Status=Active, partid=5468, series=GRM, Size / Dimension="0.063\" L x 0.031\" W (1.60mm x 0.80mm)", Supplier 1=DigiKey, Thickness (Max)="0.039\" (1.00mm)"
  C7 C13: lastupdated="15.07.2022 11:29:22", price=0.11
  C25: lastupdated="19.09.2022 13:01:11", price=0.10
C14: library part GRM188R61E475KE11D, "CAP CER 4.7UF 25V X5R 0603", Device Package="0603 (1608 Metric)", manufacturer="Murata Electronics", Operating Temperature="-55°C ~ 85°C", Supplier Part Number 1=490-7203-1-ND, Temperature Coefficient=X5R, Tolerance=±10%, Voltage - Rated=25V, Applications="General Purpose", Capacitance="4.7 µF", componentlink1description=Datasheet, componentlink1url=https://www.murata.com/~/media/webrenewal/support/library/catalog/products/capacitor/mlcc/c02e.ashx?la=en-us, componentlink2description="DigiKey Link", componentlink2url=https://www.digikey.com/en/products/detail/murata-electronics/GRM188R61E475KE11D/3900465, lastupdated="19.09.2022 13:01:19", Lifecycle Status=Active, Minimum Order=1, Mounting Type="Surface Mount, MLCC", Package / Case="0603 (1608 Metric)", packaging=TapeAndReel, Part Number=GRM188R61E475KE11D, Part Status=Active, partid=2387, price=0.05, series=GRM, Size / Dimension="0.063\" L x 0.031\" W (1.60mm x 0.80mm)", Supplier 1=DigiKey, Thickness (Max)="0.037\" (0.95mm)"
C21: library part 06036D475KAT4A, "CAP CER 4.7UF 6.3V X5R 0603", Device Package="0603 (1608 Metric)", manufacturer="AVX Corporation", Operating Temperature="-55°C ~ 85°C", Supplier Part Number 1=478-10813-1-ND, Temperature Coefficient=X5R, Tolerance=±10%, Voltage - Rated=6.3V, Applications="General Purpose", Capacitance=4.7µF, componentlink1description=Datasheet, componentlink1url=http://datasheets.avx.com/cx5r.pdf, componentlink2description="DigiKey Link", componentlink2url=http://digikey.com/product-detail/en/avx-corporation/06036D475KAT4A/478-10813-1-ND/7536337, lastupdated="02.09.2020 01:03:34", Lifecycle Status=Active, Minimum Order=1, Mounting Type="Surface Mount, MLCC", Package / Case="0603 (1608 Metric)", packaging=TapeAndReel, Part Number=06036D475KAT4A, Part Status=Active, partid=2929, price=0.02, series=-, Size / Dimension="0.063\" L x 0.032\" W (1.60mm x 0.81mm)", Supplier 1=DigiKey, Thickness (Max)="0.037\" (0.94mm)"
C26: library part GRM186R60J226ME15D, "CAP CER 22UF 6.3V X5R 0603", Device Package="0603 (1608 Metric)", manufacturer="Murata Electronics", Operating Temperature="-55°C ~ 85°C", Supplier Part Number 1=490-13241-1-ND, Temperature Coefficient=X5R, Tolerance=±20%, Voltage - Rated=6.3V, Applications="General Purpose", Capacitance="22 µF", componentlink1description=Datasheet, componentlink1url=https://psearch.en.murata.com/capacitor/product/GRM186R60J226ME15%23.pdf, componentlink2description="DigiKey Link", componentlink2url=https://www.digikey.com/en/products/detail/murata-electronics/GRM186R60J226ME15D/5877404, lastupdated="19.09.2022 13:01:20", Lifecycle Status=Active, Minimum Order=1, Mounting Type="Surface Mount, MLCC", Package / Case="0603 (1608 Metric)", packaging=TapeAndReel, Part Number=GRM186R60J226ME15D, Part Status=Active, partid=2353, price=0.06, series=GRM, Size / Dimension="0.063\" L x 0.031\" W (1.60mm x 0.80mm)", Supplier 1=DigiKey, Thickness (Max)="0.024\" (0.60mm)"
CAM: "CONN HEADER SMD R/A 4POS 1MM", Current Rating (Amps)=0.7A, Insulation Color=Natural, manufacturer="JST Sales America Inc.", Material Flammability Rating="UL94 V-0", Operating Temperature="-25°C ~ 85°C", Supplier Part Number 1=455-1804-1-ND, Voltage Rating=50V, componentlink1description=Datasheet, componentlink1url=http://www.jst-mfg.com/product/pdf/eng/eSH.pdf, componentlink2description="DigiKey Link", componentlink2url=http://digikey.com/product-detail/en/jst-sales-america-inc/SM04B-SRSS-TB-LF-SN/455-1804-1-ND/926875, Connector Type=Header, Contact Finish - Mating=Tin, Contact Finish - Post=Tin, Contact Material="Copper Alloy", Contact Shape=Square, Contact Type="Male Pin", Fastening Type=Push-Pull, Features="Solder Retention", Insulation Height="0.114\" (2.90mm)", Insulation Material="Polyamide (PA), Nylon", lastupdated="12.01.2020 23:41:52", Lifecycle Status=Active, Minimum Order=1, Mounting Type="Surface Mount, Right Angle", Number of Positions=4, Number of Positions Loaded=All, Number of Rows=1, packaging=TapeAndReel, Part Number=SM04B-SRSS-TB(LF)(SN), Part Status=Active, partid=62, Pitch - Mating="0.039\" (1.00mm)", price=0.26, series=SR, Shrouding="Shrouded - 4 Wall", Style="Board to Cable/Wire", Supplier 1=DigiKey, Termination=Solder
D S: library part QBLP601-IB, "LED BLUE CLEAR 0603 SMD", Current - Test=20mA, Device Package="0603 (1608 Metric)", Lens Color=Colorless, manufacturer="QT Brightek (QTB)", Millicandela Rating=90mcd, Supplier Device Package=0603, Supplier Part Number 1=1516-1054-1-ND, Voltage - Forward (Vf) (Typ)=3.2V, Color=Blue, componentlink1description=Datasheet, componentlink1url=http://www.qt-brightek.com/datasheet/QBLP601_series.pdf, componentlink2description="DigiKey Link", componentlink2url=https://www.digikey.com/en/products/detail/qt-brightek-qtb/QBLP601-IB/4814652, Configuration=Standard, Height (Max)=0.60mm, lastupdated="19.09.2022 13:49:29", Lens Size="1.10mm x 0.80mm", Lens Style="Rectangle with Flat Top", Lens Transparency=Clear, Lifecycle Status=Active, Minimum Order=1, Mounting Type="Surface Mount", Package / Case="0603 (1608 Metric)", packaging=TapeAndReel, Part Number=QBLP601-IB, Part Status=Active, partid=784, price=0.05, series=QBLP601, Size / Dimension="1.60mm L x 0.80mm W", Supplier 1=DigiKey, Wavelength - Dominant=470nm
D1 D2: library part CMP-2000-04943-2, "DIODE SCHOTTKY 40V 1A SMA", Forward Current=1A, manufacturer="ON Semiconductor", Max Junction Temp=+125°C, Max Repetitive Reverse Voltage=40V, Max Surge Forward Current=40A, Package=403AE, Peak Reverse Current=0.2mA, Temperature="-65°C to +125°C", Temperature Range Low=-65°C, Automotive=No, Category=Diode, componentlink2description=Datasheet, componentlink2url=https://www.onsemi.com/pub/Collateral/SS19-D.PDF, Device Class L1="Discrete Semiconductors", Device Class L2=Diodes, Device Class L3="Schottky Diodes", Digikey Description="DIODE SCHOTTKY 40V 1A SMA", Height=2.5mm, Lead Free=Yes, Manufacturer Part Number=SS14, Mouser Description="Schottky Diodes & Rectifiers SMA 40V 1.0A", Octopart=https://octopart.com/ss14-on+semiconductor-29205033, RoHS=TRUE, Standoff Height=0.05mm, Temperature Range High=+125°C
FB1 FB2: library part BLM18PG121SN1D, "FERRITE BEAD 120 OHM 0603 1LN", Current Rating (Max)=2A, DC Resistance (DCR) (Max)=50mOhm, Device Package="0603 (1608 Metric)", Impedance @ Frequency="120 Ohms @ 100 MHz", manufacturer="Murata Electronics", Operating Temperature="-55°C ~ 125°C", Supplier Part Number 1=490-1037-1-ND, componentlink1description=Datasheet, componentlink1url=https://www.murata.com/en-us/products/productdata/8796738650142/ENFA0003.pdf, componentlink2description="DigiKey Link", componentlink2url=https://www.digikey.com/en/products/detail/murata-electronics/BLM18PG121SN1D/584248, Filter Type="Power Line", Height (Max)="0.037\" (0.95mm)", lastupdated="19.09.2022 13:43:58", Lifecycle Status=Active, Minimum Order=1, Mounting Type="Surface Mount", Number of Lines=1, Package / Case="0603 (1608 Metric)", packaging=TapeAndReel, Part Number=BLM18PG121SN1D, Part Status=Active, partid=853, price=0.02, series="EMIFIL®, BLM18", Size / Dimension="0.063\" L x 0.032\" W (1.60mm x 0.80mm)", Supplier 1=DigiKey
GPS: "CONN HEADER SMD R/A 6POS 1MM", Current Rating (Amps)=0.7A, Insulation Color=Natural, manufacturer="JST Sales America Inc.", Material Flammability Rating="UL94 V-0", Operating Temperature="-25°C ~ 85°C", Supplier Part Number 1=455-1806-1-ND, Voltage Rating=50V, componentlink1description=Datasheet, componentlink1url=http://www.jst-mfg.com/product/pdf/eng/eSH.pdf, componentlink2description="DigiKey Link", componentlink2url=http://digikey.com/product-detail/en/jst-sales-america-inc/SM06B-SRSS-TB-LF-SN/455-1806-1-ND/926877, Connector Type=Header, Contact Finish - Mating=Tin, Contact Finish - Post=Tin, Contact Material="Copper Alloy", Contact Shape=Square, Contact Type="Male Pin", Fastening Type=Push-Pull, Features="Solder Retention", Insulation Height="0.114\" (2.90mm)", Insulation Material="Polyamide (PA), Nylon", lastupdated="12.01.2020 23:42:14", Lifecycle Status=Active, Minimum Order=1, Mounting Type="Surface Mount, Right Angle", Number of Positions=6, Number of Positions Loaded=All, Number of Rows=1, packaging=TapeAndReel, Part Number=SM06B-SRSS-TB(LF)(SN), Part Status=Active, partid=64, Pitch - Mating="0.039\" (1.00mm)", price=0.36, series=SR, Shrouding="Shrouded - 4 Wall", Style="Board to Cable/Wire", Supplier 1=DigiKey, Termination=Solder
IMU: "IMU ACCEL/GYRO I2C/SPI 14LGA", Package=None, Availability=Unavailable, MF="{'manufacturer': u'Bosch Sensortec'}", MP=BMI270, price=None
OSD: "Integrated Circuit", Manufacturer_Name=ICOF, Datasheet Link=https://datasheet.lcsc.com/szlcsc/ZHONGKEWEI-AT7456E_C82351.pdf, Height=1.2mm, Manufacturer_Part_Number=AT7456E
P: library part QBLP601-R, "LED RED CLEAR 0603 SMD", Current - Test=20mA, Device Package="0603 (1608 Metric)", Lens Color=Colorless, manufacturer="QT Brightek (QTB)", Millicandela Rating=100mcd, Supplier Device Package=0603, Supplier Part Number 1=1516-1059-1-ND, Voltage - Forward (Vf) (Typ)=2V, Color=Red, componentlink1description=Datasheet, componentlink1url=http://www.qt-brightek.com/datasheet/QBLP601_series.pdf, componentlink2description="DigiKey Link", componentlink2url=https://www.digikey.com/en/products/detail/qt-brightek-qtb/QBLP601-R/4814657, Configuration=Standard, Height (Max)=0.60mm, lastupdated="19.09.2022 13:50:25", Lens Size="1.10mm x 0.80mm", Lens Style="Rectangle with Flat Top", Lens Transparency=Clear, Lifecycle Status=Active, Minimum Order=1, Mounting Type="Surface Mount", Package / Case="0603 (1608 Metric)", packaging=TapeAndReel, Part Number=QBLP601-R, Part Status=Active, partid=383, price=0.05, series=QBLP601, Size / Dimension="1.60mm L x 0.80mm W", Supplier 1=DigiKey, Viewing Angle=140°, Wavelength - Dominant=625nm
PDB: "CONN HEADER SMD R/A 8POS 1MM", Current Rating (Amps)=0.7A, Insulation Color=Natural, manufacturer="JST Sales America Inc.", Material Flammability Rating="UL94 V-0", Operating Temperature="-25°C ~ 85°C", Supplier Part Number 1=455-1808-1-ND, Voltage Rating=50V, componentlink1description=Datasheet, componentlink1url=http://www.jst-mfg.com/product/pdf/eng/eSH.pdf, componentlink2description="DigiKey Link", componentlink2url=http://digikey.com/product-detail/en/jst-sales-america-inc/SM08B-SRSS-TB-LF-SN/455-1808-1-ND/926879, Connector Type=Header, Contact Finish - Mating=Tin, Contact Finish - Post=Tin, Contact Material="Copper Alloy", Contact Shape=Square, Contact Type="Male Pin", Fastening Type=Push-Pull, Features="Solder Retention", Insulation Height="0.114\" (2.90mm)", Insulation Material="Polyamide (PA), Nylon", lastupdated="12.01.2020 23:42:39", Lifecycle Status=Active, Minimum Order=1, Mounting Type="Surface Mount, Right Angle", Number of Positions=8, Number of Positions Loaded=All, Number of Rows=1, packaging=TapeAndReel, Part Number=SM08B-SRSS-TB(LF)(SN), Part Status=Active, partid=66, Pitch - Mating="0.039\" (1.00mm)", price=0.41, series=SR, Shrouding="Shrouded - 4 Wall", Style="Board to Cable/Wire", Supplier 1=DigiKey, Termination=Solder
R1 R3 R4 R6 R7 R8 R9: library part RS73F1JTTD1002B, "RES 10K OHM 0.1% 1/5W 0603", Device Package="0603 (1608 Metric)", manufacturer="KOA Speer Electronics, Inc.", Operating Temperature="-55°C ~ 155°C", Power (Watts)="0.2W, 1/5W", Ratings=AEC-Q200, Supplier Device Package=0603, Supplier Part Number 1=2019-RS73F1JTTD1002BCT-ND, Temperature Coefficient=±25ppm/°C, Tolerance=±0.1%, componentlink1description=Datasheet, componentlink1url=http://www.koaspeer.com/pdfs/RS73.pdf, componentlink2description="DigiKey Link", componentlink2url=https://www.digikey.com/en/products/detail/koa-speer-electronics-inc/RS73F1JTTD1002B/11594389, Composition="Thick Film", Features="Automotive AEC-Q200, Moisture Resistant", Height - Seated (Max)="0.022\" (0.55mm)", lastupdated="15.07.2022 11:48:43", Lifecycle Status=Active, Minimum Order=1, Number of Terminations=2, Package / Case="0603 (1608 Metric)", packaging=TapeAndReel, Part Number=RS73F1JTTD1002B, Part Status=Active, partid=56378, price=0.08, Resistance="10 kOhms", series=RS73, Size / Dimension="0.063\" L x 0.031\" W (1.60mm x 0.80mm)", Supplier 1=DigiKey
R2 R5 R10 R15 R16 R20 R21: library part SG73S1JTTD1001F, "RES 1K OHM 1% 1/5W 0603", Device Package="0603 (1608 Metric)", manufacturer="KOA Speer Electronics, Inc.", Operating Temperature="-55°C ~ 155°C", Power (Watts)="0.2W, 1/5W", Ratings=AEC-Q200, Supplier Device Package=0603, Supplier Part Number 1=2019-SG73S1JTTD1001FCT-ND, Temperature Coefficient=±100ppm/°C, Tolerance=±1%, componentlink1description=Datasheet, componentlink1url=http://www.koaspeer.com/catimages/Products/SG73S/SG73S.pdf, componentlink2description="DigiKey Link", componentlink2url=https://www.digikey.com/en/products/detail/koa-speer-electronics-inc/SG73S1JTTD1001F/10279992, Composition="Thick Film", Features="Automotive AEC-Q200, Moisture Resistant, Pulse Withstanding", Height - Seated (Max)="0.022\" (0.55mm)", lastupdated="19.09.2022 13:20:55", Lifecycle Status=Active, Minimum Order=1, Number of Terminations=2, Package / Case="0603 (1608 Metric)", packaging=TapeAndReel, Part Number=SG73S1JTTD1001F, Part Status=Active, partid=26528, price=0.01, Resistance="1 kOhms", series=SG73S, Size / Dimension="0.063\" L x 0.031\" W (1.60mm x 0.80mm)", Supplier 1=DigiKey
R11 R12: library part RMCF0603FT22R0, "RES 22 OHM 1% 1/10W 0603", Device Package="0603 (1608 Metric)", manufacturer="Stackpole Electronics Inc", Operating Temperature="-55°C ~ 155°C", Power (Watts)="0.1W, 1/10W", Ratings=AEC-Q200, Supplier Device Package=0603, Supplier Part Number 1=RMCF0603FT22R0CT-ND, Temperature Coefficient=±100ppm/°C, Tolerance=±1%, componentlink1description=Datasheet, componentlink1url=https://www.seielect.com/catalog/sei-packaging.pdf, componentlink2description="DigiKey Link", componentlink2url=https://www.digikey.com/en/products/detail/stackpole-electronics-inc/RMCF0603FT22R0/1760726, Composition="Thick Film", Features="Automotive AEC-Q200", Height - Seated (Max)="0.022\" (0.55mm)", lastupdated="19.09.2022 13:22:13", Lifecycle Status=Active, Minimum Order=1, Number of Terminations=2, Package / Case="0603 (1608 Metric)", packaging=CutTape, Part Number=RMCF0603FT22R0, Part Status=Active, partid=10611, price=0.01, Resistance="22 Ohms", series=RMCF, Size / Dimension="0.061\" L x 0.031\" W (1.55mm x 0.80mm)", Supplier 1=DigiKey
R13 R14: library part RK73H1JRTTD5101F, "RES 5.1 KOHM 1% 1/10W 0603", Device Package="0603 (1608 Metric)", manufacturer="KOA Speer Electronics, Inc.", Operating Temperature="-55°C ~ 155°C", Power (Watts)="0.1W, 1/10W", Ratings=AEC-Q200, Supplier Device Package=0603, Supplier Part Number 1=2019-RK73H1JRTTD5101FCT-ND, Temperature Coefficient=±100ppm/°C, Tolerance=±1%, componentlink1description=Datasheet, componentlink1url=https://www.koaspeer.com/pdfs/RK73-RT.pdf, componentlink2description="DigiKey Link", componentlink2url=https://www.digikey.com/en/products/detail/koa-speer-electronics-inc/RK73H1JRTTD5101F/12314799, Composition="Thick Film", Features="Anti-Sulfur, Automotive AEC-Q200, Moisture Resistant", Height - Seated (Max)="0.022\" (0.55mm)", lastupdated="19.09.2022 13:20:25", Lifecycle Status=Active, Minimum Order=1, Number of Terminations=2, Package / Case="0603 (1608 Metric)", packaging=TapeAndReel, Part Number=RK73H1JRTTD5101F, Part Status=Active, partid=65375, price=0.01, Resistance="5.1 kOhms", series=RK73-RT, Size / Dimension="0.063\" L x 0.031\" W (1.60mm x 0.80mm)", Supplier 1=DigiKey
R17 R18 R19: library part RK73B1JTTD511J, "RES 510 OHM 5% 1/8W 0603", Device Package="0603 (1608 Metric)", manufacturer="KOA Speer Electronics, Inc.", Operating Temperature="-55°C ~ 155°C", Power (Watts)="0.125W, 1/8W", Ratings=AEC-Q200, Supplier Device Package=0603, Supplier Part Number 1=2019-RK73B1JTTD511JCT-ND, Temperature Coefficient=±200ppm/°C, Tolerance=±5%, componentlink1description=Datasheet, componentlink1url=http://www.koaspeer.com/catimages/Products/RK73B/RK73B.pdf, componentlink2description="DigiKey Link", componentlink2url=https://www.digikey.com/en/products/detail/koa-speer-electronics-inc/RK73B1JTTD511J/9844735, Composition="Thick Film", Features="Automotive AEC-Q200", Height - Seated (Max)="0.022\" (0.55mm)", lastupdated="19.09.2022 13:22:30", Lifecycle Status=Active, Minimum Order=1, Number of Terminations=2, Package / Case="0603 (1608 Metric)", packaging=CutTape, Part Number=RK73B1JTTD511J, Part Status=Active, partid=5988, price=0.01, Resistance="510 Ohms", series=RK73B, Size / Dimension="0.063\" L x 0.031\" W (1.60mm x 0.80mm)", Supplier 1=DigiKey
R22 R23: library part RNCP0603FTD75R0, "RES 75 OHM 1% 1/8W 0603", Device Package="0603 (1608 Metric)", manufacturer="Stackpole Electronics Inc", Operating Temperature="-55°C ~ 155°C", Power (Watts)="0.125W, 1/8W", Supplier Device Package=0603, Supplier Part Number 1=RNCP0603FTD75R0CT-ND, Temperature Coefficient=±100ppm/°C, Tolerance=±1%, componentlink1description=Datasheet, componentlink1url=https://www.seielect.com/catalog/sei-rncp.pdf, componentlink2description="DigiKey Link", componentlink2url=https://www.digikey.com/en/products/detail/stackpole-electronics-inc/RNCP0603FTD75R0/2240084, Composition="Thin Film", Features=Anti-Sulfur, Height - Seated (Max)="0.022\" (0.55mm)", lastupdated="19.09.2022 13:22:31", Lifecycle Status=Active, Minimum Order=1, Number of Terminations=2, Package / Case="0603 (1608 Metric)", packaging=TapeAndReel, Part Number=RNCP0603FTD75R0, Part Status=Active, partid=5698, price=0.01, Resistance="75 Ohms", series=RNCP, Size / Dimension="0.061\" L x 0.031\" W (1.55mm x 0.80mm)", Supplier 1=DigiKey
SW1: library part CMP-10040-000001-2, "SWITCH TACTILE SPST-NO 0.05A 16V", Case/Package=SMD/SMT, Color=Black, Current Rating=50mA, Max Operating Temperature=85°C, Min Operating Temperature=-40°C, Operating Force=160gf, Package Quantity=2900, Voltage Rating (DC)=16V, Actuator Type=Standard, Contact Plating=Silver, Depth=4.6mm, Illumination Type=Non-Illuminated, Lead Free="Lead Free", Length=3.2mm, Max Current Rating=50mA, Mechanical Life=150000Cycles, Mount="Surface Mount", Orientation=Straight, packaging="Tape and Reel", RoHS Compliant=Yes, Switch Function=Off-Mom, Switch Travel=0.15mm, Termination=J-Bend, Throw Configuration=SPST
SWD: "Header, 3-Pin, Dual row", LatestRevisionDate=17-Jul-2002, LatestRevisionNote="Re-released for DXP Platform.", Publisher="Altium Limited"
U1: library part CMP-12105-000139-1, "IC MCU 32BIT 512KB FLASH 64LQFP", Case/Package=LQFP, Frequency=216MHz, Max Operating Temperature=85°C, Min Operating Temperature=-40°C, Core Architecture=ARM, Interface=I2C, Memory Size=512KB, Memory Type=FLASH, Mount="Surface Mount", Number of I/Os=50, Oscillator Type=Internal, packaging=Tray, Peripherals="Brown-out Detect/Reset"
U2: "Power Supply", Manufacturer_Name=onsemi, Mouser Part Number=863-NCP161ASN330T1G, Arrow Part Number=NCP161ASN330T1G, Arrow Price/Stock=https://www.arrow.com/en/products/ncp161asn330t1g/on-semiconductor?region=nac, Datasheet Link=https://componentsearchengine.com/Datasheets/2/NCP161ASN330T1G.pdf, Height=1.45mm, Manufacturer_Part_Number=NCP161ASN330T1G, Mouser Price/Stock=https://www.mouser.co.uk/ProductDetail/onsemi/NCP161ASN330T1G?qs=vLWxofP3U2ze5zA%252BHmAd3w%3D%3D
USB: "USB-C (USB TYPE-C) USB 2.0 Receptacle Connector 24 (16+8 Dummy) Position Surface Mount, Right Angle; Through Hole", Package=None, Availability=Unavailable, MF="{'manufacturer': u'GCT'}", MP=USB4105-GF-A, price=None
X1: library part NX3225GA-16.000M-STD-CRG-2, "CRYSTAL 16.0000MHZ 8PF SMD", ESR (Equivalent Series Resistance)="80 Ohms", Frequency Stability=±30ppm, Frequency Tolerance=±20ppm, Load Capacitance=8pF, manufacturer="NDK America, Inc.", Operating Mode=Fundamental, Operating Temperature="-40°C ~ 85°C", Package / Case="4-SMD, No Lead", Supplier Part Number 1=644-1175-1-ND, componentlink1description=Datasheet, componentlink1url=http://www.ndk.com/images/products/catalog/c_NX3225GA-STD-CRG-2_e.pdf, componentlink2description="DigiKey Link", componentlink2url=https://www.digikey.com/en/products/detail/ndk-america-inc/NX3225GA-16-000M-STD-CRG-2/3125634, Frequency="16 MHz", Height - Seated (Max)="0.035\" (0.90mm)", lastupdated="19.09.2022 13:51:54", Lifecycle Status=Active, Minimum Order=1, Mounting Type="Surface Mount", packaging=TapeAndReel, Part Number=NX3225GA-16.000M-STD-CRG-2, Part Status=Active, partid=549, price=0.33, series=NX3225GA, Size / Dimension="0.126\" L x 0.098\" W (3.20mm x 2.50mm)", Supplier 1=DigiKey, Type="MHz Crystal"
X2: library part ABM10-27.000MHZ-D30-T3, "CRYSTAL 27.0000MHZ 10PF SMD", Device Package="4-SMD, No Lead", ESR (Equivalent Series Resistance)="100 Ohms", Frequency Stability=±30ppm, Frequency Tolerance=±20ppm, Load Capacitance=10pF, manufacturer="Abracon LLC", Operating Mode=Fundamental, Operating Temperature="-40°C ~ 85°C", Supplier Part Number 1=535-10934-1-ND, componentlink1description=Datasheet, componentlink1url=https://abracon.com/Resonators/ABM10.pdf, componentlink2description="DigiKey Link", componentlink2url=http://digikey.com/product-detail/en/abracon-llc/ABM10-27.000MHZ-D30-T3/535-10934-1-ND/2624185, Frequency=27MHz, Height - Seated (Max)="0.028\" (0.70mm)", lastupdated="19.03.2020 22:27:46", Lifecycle Status=Active, Minimum Order=1, Mounting Type="Surface Mount", Package / Case="4-SMD, No Lead", packaging=TapeAndReel, Part Number=ABM10-27.000MHZ-D30-T3, Part Status=Active, partid=274, price=0.67, series=ABM10, Size / Dimension="0.098\" L x 0.079\" W (2.50mm x 2.00mm)", Supplier 1=DigiKey, Type="MHz Crystal"
+5 G J1 J2 J3 J4 J5 J6 J9 J10 J11 J12 RX6 TX6: LatestRevisionDate=17-Jul-2002, LatestRevisionNote="Re-released for DXP Platform.", Publisher="Altium Limited"

## Free pads (board coordinates)
  round 1.5 smd far side: 3(41.3,56.1) 4(43.3,56.1) 5(45.3,56.1)
  round 3 hole 2: MH(33.05,24.85) MH(33.05,55.35) MH(63.55,24.85) MH(63.55,55.35)
  round 1.152 hole 1.152: TH(31.7,53.2) TH(64.9,27)

## Via types
v1: diameter 0.6, hole 0.25, Top Layer to Bottom Layer, 30 vias
v2: diameter 0.55, hole 0.25, Top Layer to Bottom Layer, 21 vias
v3: diameter 0.9, hole 0.4, Top Layer to Bottom Layer, 6 vias

## Nets (pads, with @x,y where several pads share a name; then routed paths per layer and width w, separated by ;. In a path a pad name is that pad's centre, name@x,y a point inside that pad or via, vN(x,y) a via of type N, cw(c..) or ccw(c..) an arc to the next point about the centre after c; other vN are vias at no path point)
+3.3: C4.2 C9.2 FB1.1 U2.5 | length 5.8
  Top Layer w0.5: C4.2@48.875,43.3 C9.2@48.875,41.6 FB1.1@48.875,39.9 48.975,40 51.2,40 U2.5@51.25,40.05
+5: +5.1 C8.2 C10.2 CAM.1 D1.2 D2.2 FB2.1 J5.1 J12.1 P.1 U2.1 U2.3 | length 31.2
  Top Layer w0.4: J5.1@34.8,28.1 34.858,28.158 35.946,28.158 37.988,30.2 38.612,30.2 39.8,29.012 39.8,28.65 P.1@40,28.45
  Top Layer w0.5: v3(35.8,52.304) 36.95,52.304 37,52.254 CAM.1@37,52.168 ; D1.2@52.2,44.25 52.2,43.8 53.425,42.575 53.425,42 54.075,42 54.075,42.275 55.6,43.8 D2.2@55.6,44.25 ; U2.3@53.975,41.9 54.9,41.9 55.368,41.432 55.368,40.343 55.075,40.05 U2.1@53.75,40.05 53.775,40.025 53.775,37.8 C8.2@53.8,37.775 FB2.1@57.2,37.775 57.2,38.975 58.825,40.6 +5.1@61.8,40.6
+5_PDB: D1.1 PDB.2 | length 14.5
  Top Layer w0.5: PDB.2@45.8,51.668 45.8,53.307 46.372,53.879 52.123,53.879 53.3,52.702 53.3,51.457 52.2,50.357 D1.1@52.2,48.55
+5_USB: D2.1 R8.2 USB.A4_B9 USB.B4_A9 | length 10.2
  Top Layer w0.5: R8.2@56.55,51.6 56.55,49.95 ; USB.A4_B9@58.345,45.6 57.086,45.6 56.225,46.461 56.225,47.925 D2.1@55.6,48.55 55.6,49 56.55,49.95 ; USB.B4_A9@58.345,50.4 57,50.4 56.55,49.95
ADC1_IN8: PDB.7 U1.25 | length 18.8
  Top Layer w0.3: v1(43.59,47.937) 44.385,47.141 47.498,47.141 50.8,50.443 PDB.7@50.8,51.668
  Bottom Layer w0.3: U1.25@42.55,40.35 43.295,40.35 43.89,40.945 43.89,44.307 43.59,44.607 v1(43.59,47.937)
ADC1_IN9: pad.3 U1.26 | length 19.9
  Bottom Layer w0.25: pad.3@41.3,56.1 38.4,53.2 38.4,48.104 37.835,47.539 37.835,43.4 40.385,40.85 U1.26@42.55,40.85
AUD: CAM.4 J4.1 | length 32.9
  Top Layer w0.3: J4.1@34.8,33.1 33.73,33.1 33.454,32.824 33.454,32.402 32.998,31.946 31.602,31.946 31.146,32.402 31.146,48.858 35.709,53.421 39.824,53.421 40,53.245 CAM.4@40,52.168
BOOT0: BOOT.2 R1.2 U1.60 | length 9
  Bottom Layer w0.3: U1.60@54.05,38.35 54.927,38.35 55.032,38.455 56.968,38.455 57.699,37.724 57.699,35.556 58.43,34.825 58.525,34.825 R1.2@58.8,34.55 58.775,34.525 BOOT.2@58.775,33.2
BUZZER_PWM: pad.4 U1.35 | length 11.4
  Bottom Layer w0.25: pad.4@43.3,56.1 45.365,53.835 45.365,48.959 44.981,48.575 44.981,47.478 45.55,46.909 U1.35@45.55,45.85
CAM: C27.1 CAM.3 R23.2 | length 3.7
  Top Layer w0.5: CAM.3@39,52.168 39,50.6 39.25,50.35 R23.2@39.25,50.3 39.262,50.287 39.262,48.613 C27.1@39.275,48.6
CC1: R14.1 USB.A5 | length 10.6
  Top Layer w0.3: USB.A5@58.345,46.75 60.573,46.75 61.3,47.477 61.3,52.6 60.4,53.5 R14.1@60.4,54.45
CC2: R13.1 USB.B5 | length 7.4
  Top Layer w0.3: USB.B5@58.345,49.75 59.45,49.75 60.55,50.85 60.55,52.529 59.729,53.35 59.05,53.35 58.7,53.7 R13.1@58.7,54.45